# Allegro board pc053a_toplevel_03.brd
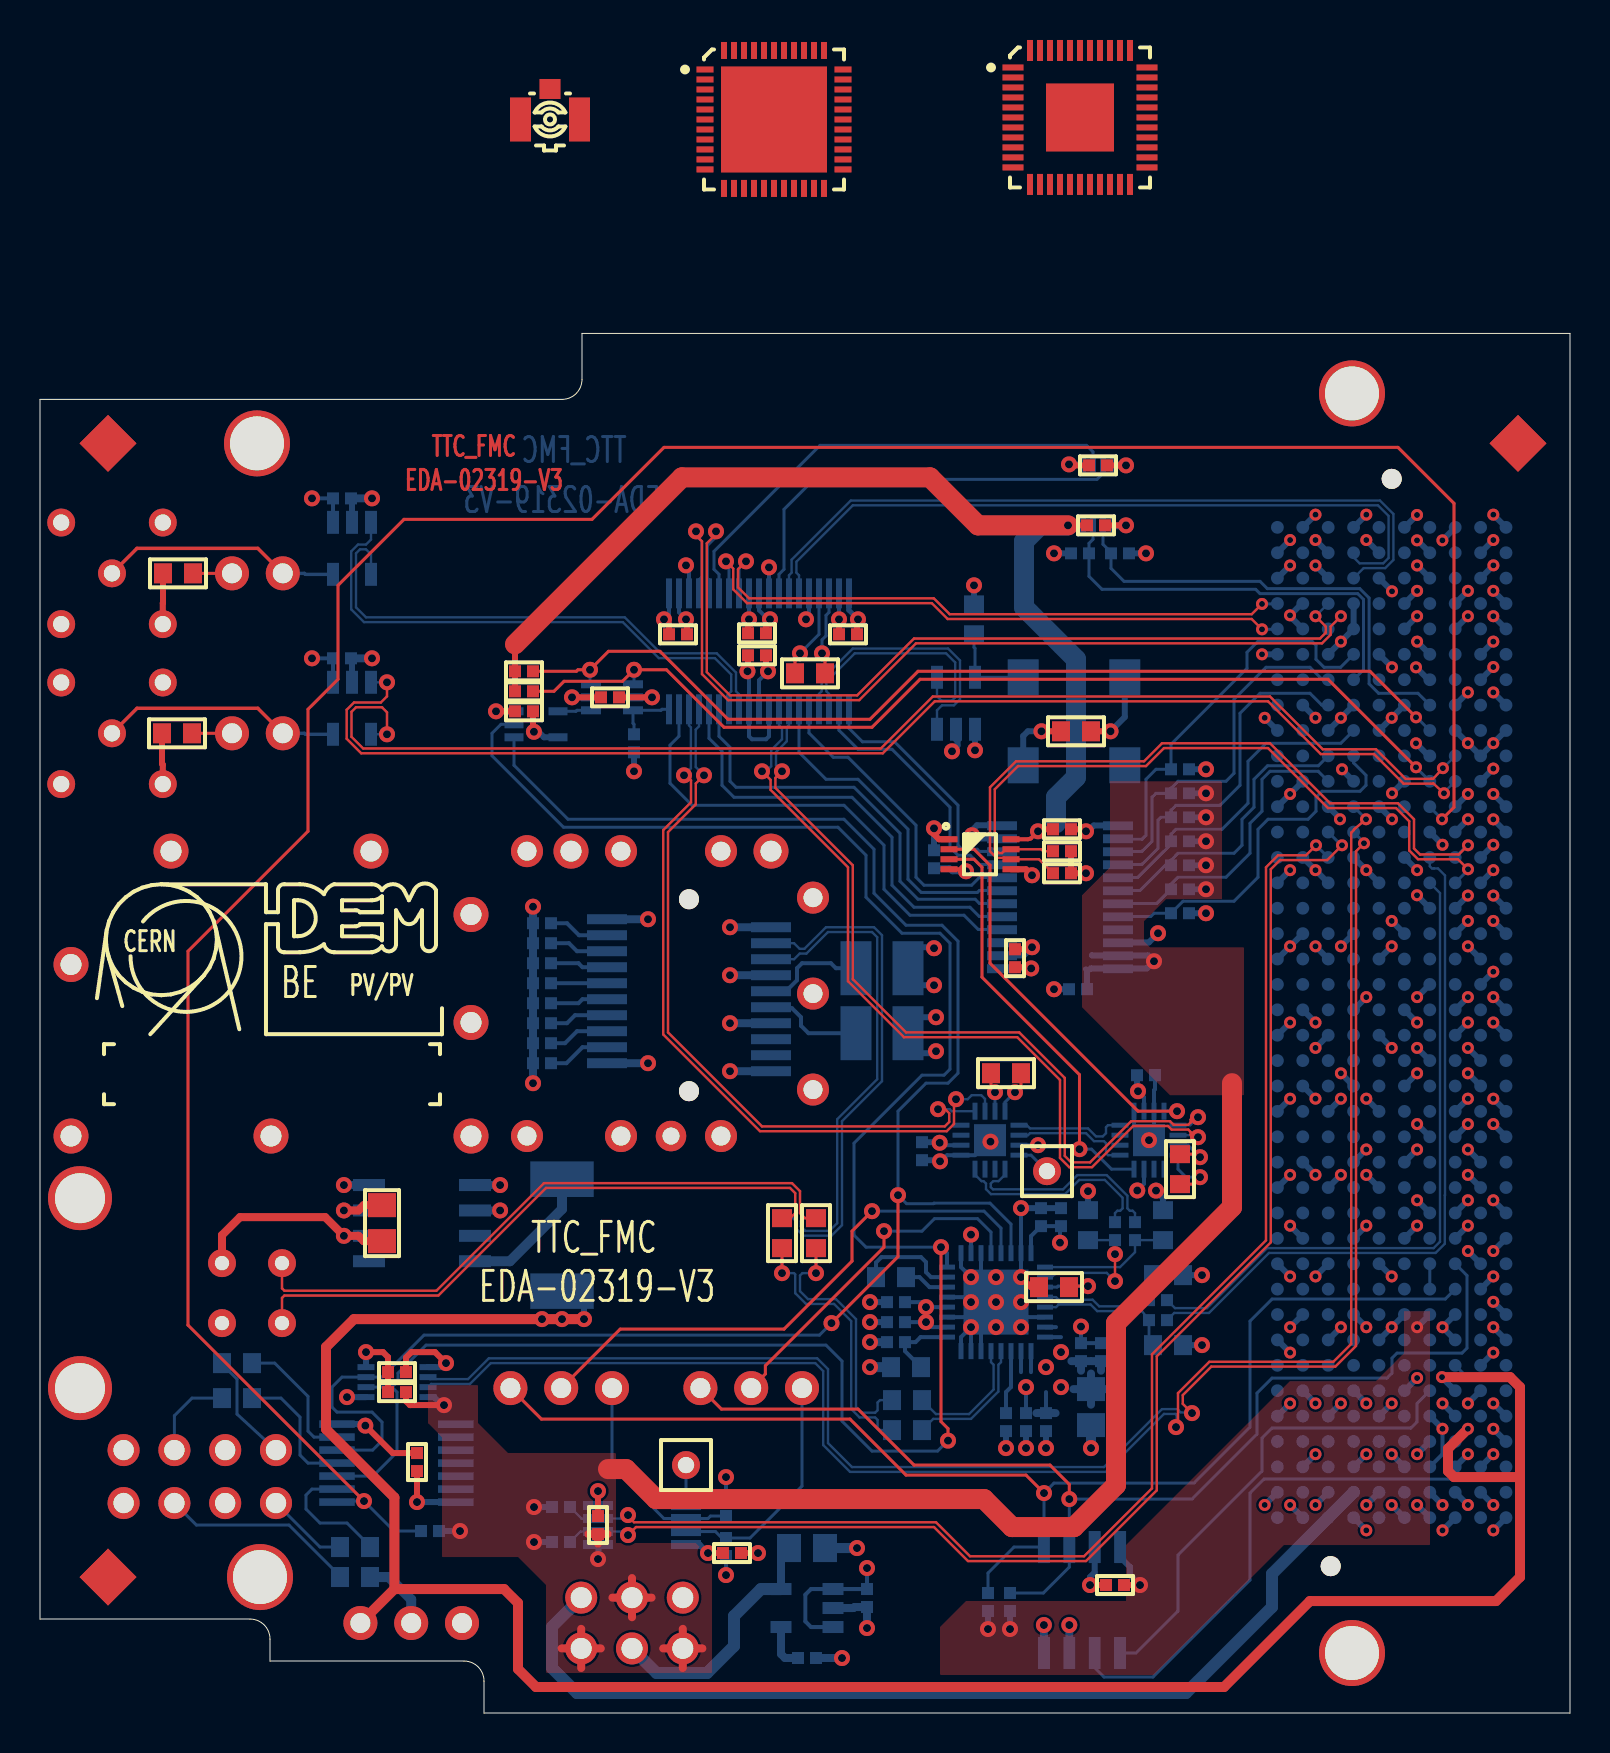
[diagram p0: board, top side]
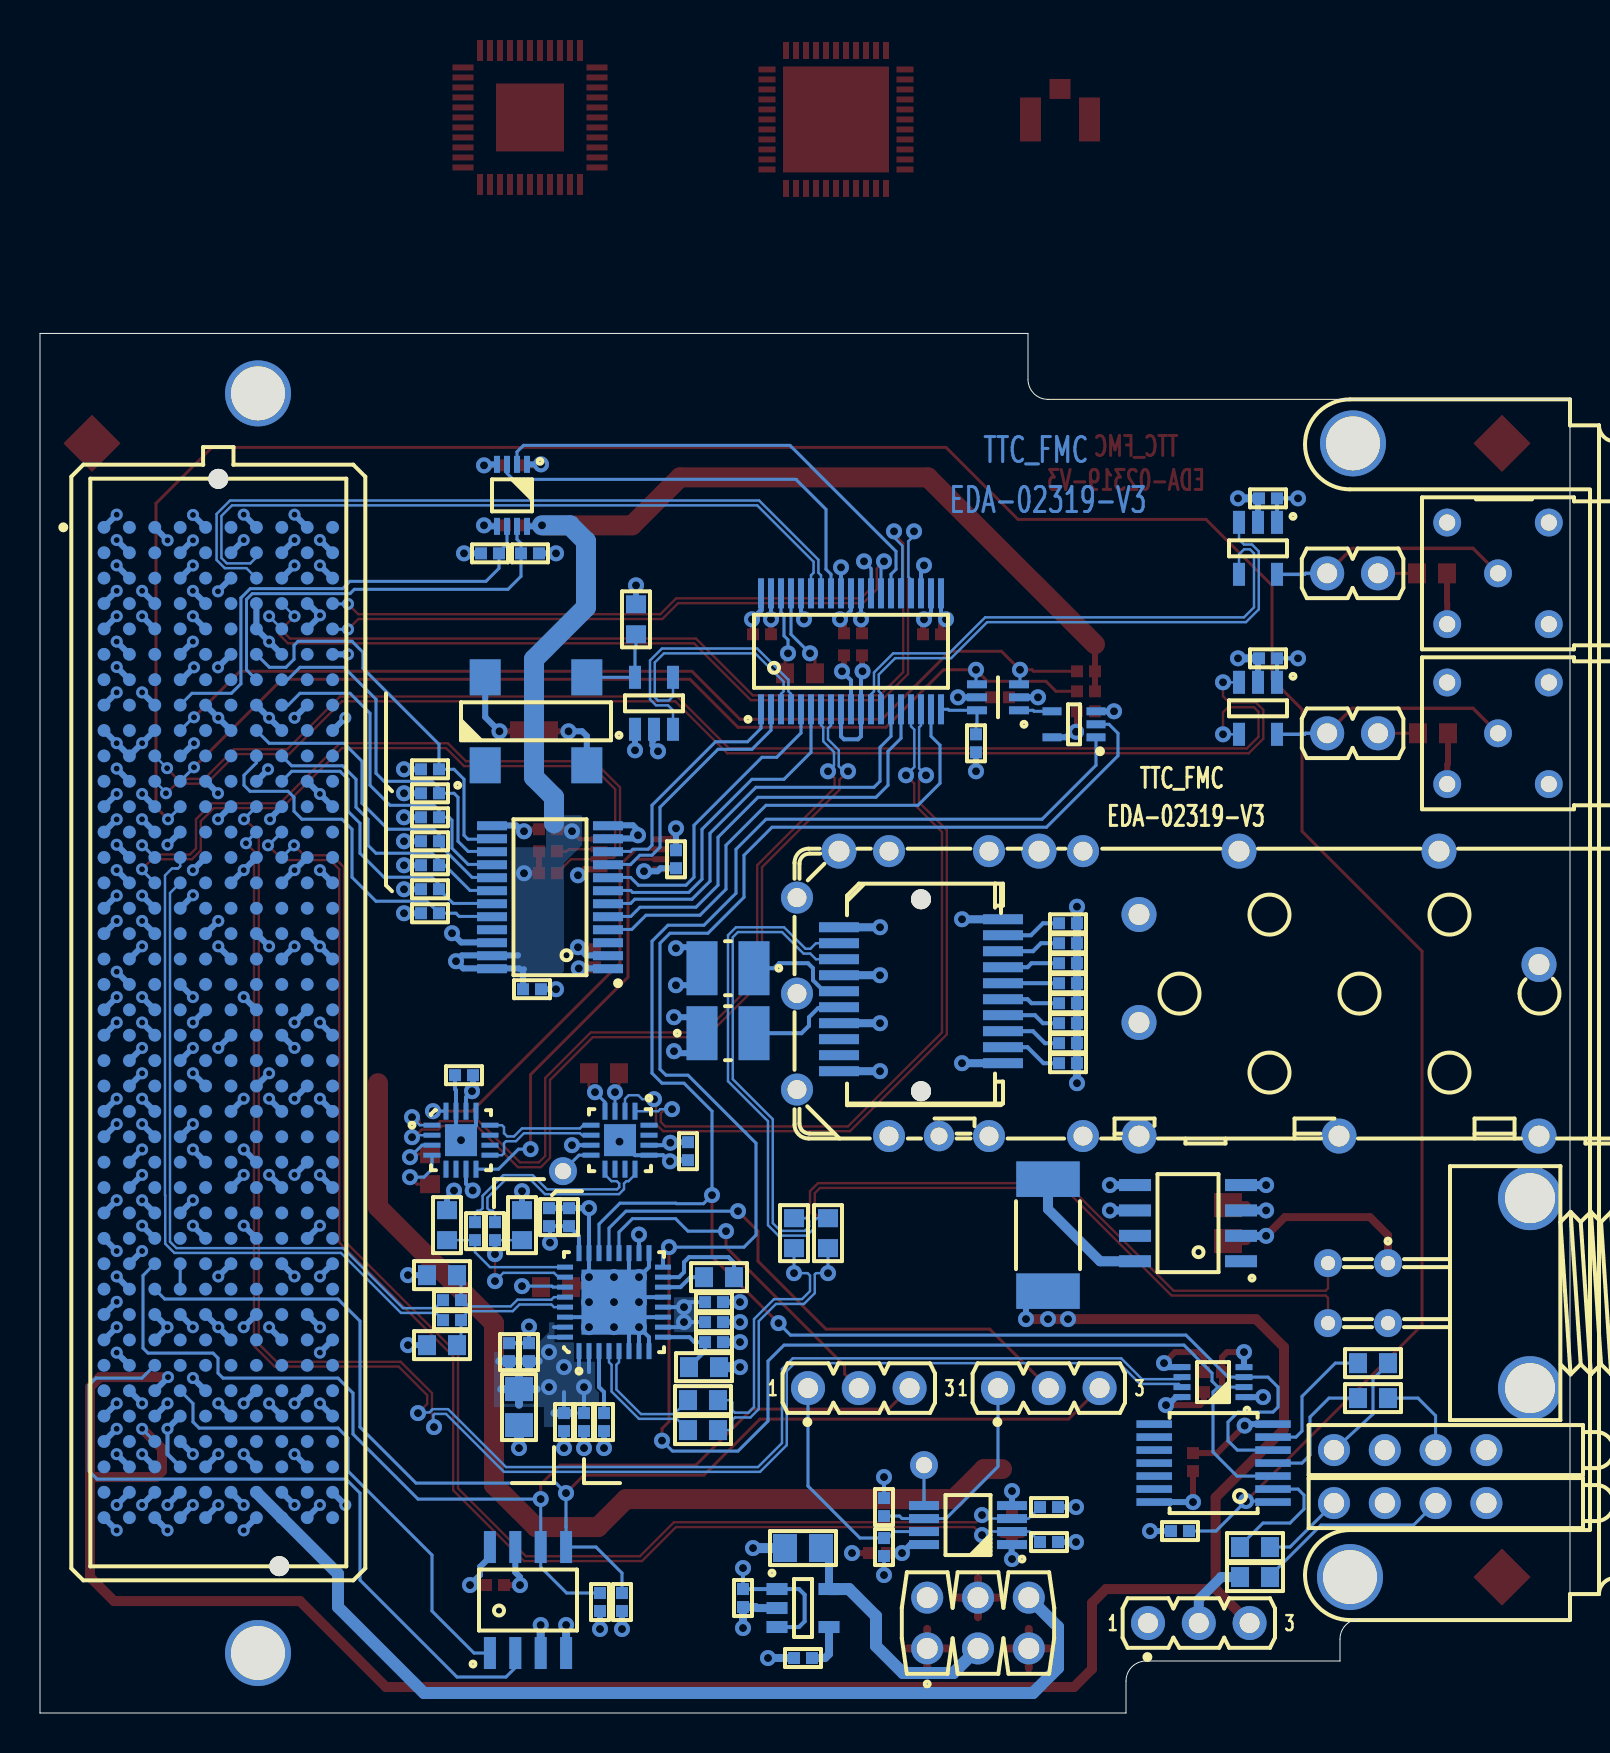
[diagram p1: board, bottom side, seen from below]

Outline 76.5 x 69 mm; copper layers: TOP, L2PWR, L3GND, BOTTOM. Coordinates in mm from the lower left corner of the outline.
Outline path: 0,65.7 26.1,65.7 arc(26.81,65.99) 27.1,66.7 27.1,69 76.5,69 76.5,0 22.2,0 22.2,1.6 arc(21.91,2.31) 21.2,2.6 11.5,2.6 11.5,3.7 arc(11.21,4.41) 10.5,4.7 0,4.7 0,65.7

## Design rules (mm)
constraint set DEFAULT: min track width 0.15
net group CDR_CLK_DIVIDED_QB0: nets CDR_CLK_DIVIDED_QB0_N CDR_CLK_DIVIDED_QB0_P
net group CDR_CLK_FANOUT_Q0: nets CDR_CLK_FANOUT_Q0_N CDR_CLK_FANOUT_Q0_P
net group CDR_CLK_FANOUT_Q2: nets CDR_CLK_FANOUT_Q2_N CDR_CLK_FANOUT_Q2_P
net group CDR_CLKOUT: nets CDR_CLKOUT_N CDR_CLKOUT_P
net group CDR_DATAOUT: nets CDR_DATAOUT_N CDR_DATAOUT_P
net group CDR_IN: nets CDR_IN_N CDR_IN_P
net group CLKOUT: nets CLKOUT_N CLKOUT_P
net group DATAOUT: nets DATAOUT_N DATAOUT_P
net group FICER: nets FICER_N FICER_P
net group FMC_CLK0_M2C: nets FMC_CLK0_M2C_N FMC_CLK0_M2C_P
net group FMC_CLK1_M2C: nets FMC_CLK1_M2C_N FMC_CLK1_M2C_P
net group FMC_CLK2_BIDIR: nets FMC_CLK2_BIDIR_N FMC_CLK2_BIDIR_P
net group FMC_LA06: nets FMC_LA06_N FMC_LA06_P
net group FMC_LA07: nets FMC_LA07_N FMC_LA07_P
net group FMC_LA08: nets FMC_LA08_N FMC_LA08_P
net group FMC_LA10: nets FMC_LA10_N FMC_LA10_P
net group FRONT_PANEL_CLK: nets FRONT_PANEL_CLK_N FRONT_PANEL_CLK_P
net group IN: nets IN_N IN_P
net group TTCSFP: nets TTCSFP_N TTCSFP_P
net group XTAL: nets XTAL_N XTAL_P
nets with their own width: min track width 0.17; nets LEMO1 LEMO2
nets with their own width: min track width 0.3; nets CVCC GND P3V3

## Placement (name value [footprint] x y rotation side)
C1  100nF  [C0402]  24.2 50.1 180 top
C2  100nF  [C0402]  28.5 50.8 180 top
C3  100nF  [C0402]  31.9 53.95 0 top
C4  100nF  [C0402]  35.85 54 180 top
C5  100nF  [C0402]  35.85 52.9 180 top
C6  100nF  [C0402]  40.4 53.95 180 top
C7  100nF  [C0402]  52.9 62.4 0 top
C8  100nF  [C0402]  52.8 59.4 180 top
C9  10nF  [C0603]  51.8 49.1 180 top
C10  100nF  [C0402]  51.1 44.2 180 top
C11  100nF  [C0402]  48.75 37.75 270 top
C12  10uF  [C0805]  17.1 24.5 270 top
C13  100nF  [C0402]  17.85 17.05 180 top
C14  100nF  [C0402]  17.85 16.05 0 top
C15  100nF  [C0402]  18.85 12.55 270 top
C16  100nF  [C0402]  27.9 9.4 270 top
C17  100nF  [C0402]  34.6 8 180 top
C18  100nF  [C0402]  53.75 6.4 0 top
C19  15pF  [C0603]  46.7 54.7 270 bottom
C20  100nF  [C0402]  29.7 48.5 270 bottom
C21  100nF  [C0402]  15.1 60.75 180 bottom
C22  100nF  [C0402]  15.1 52.75 180 bottom
C23  100nF  [C0402]  51.9 36.2 0 bottom
C24  100nF  [C0402]  44.7 42.7 270 bottom
C25  100nF  [C0402]  55.3 31.9 180 bottom
C26  100nF  [C0402]  44.1 28.1 90 bottom
C27  100nF  [C0402]  54.75 24.1 90 bottom
C28  100nF  [C0402]  53.75 24.1 90 bottom
C29  100nF  [C0402]  51.05 24.8 270 bottom
C30  1.0nF  [C0402]  50.05 24.8 270 bottom
C31  100nF  [C0402]  55.9 20.65 0 bottom
C32  100nF  [C0402]  55.9 19.65 0 bottom
C33  100nF  [C0402]  53.05 18.05 270 bottom
C34  1.0nF  [C0402]  52.05 18.05 270 bottom
C35  10uF  [C0805]  52.55 15.3 90 bottom
C36  100nF  [C0402]  50.3 14.55 90 bottom
C37  1.0nF  [C0402]  49.3 14.55 90 bottom
C38  100nF  [C0402]  48.3 14.55 90 bottom
C39  470nF  [C0603]  42.55 21.8 0 bottom
C40  100nF  [C0402]  42.8 20.55 0 bottom
C41  1.0nF  [C0402]  42.8 19.55 0 bottom
C42  100nF  [C0402]  42.8 18.55 0 bottom
C43  1.5uF  [C0603]  43.35 15.65 0 bottom
C44  1.5uF  [C0603]  43.35 14.15 0 bottom
C45  2.2uF  [C0805]  38.35 8.25 180 bottom
C46  100nF  [C0402]  41.35 5.75 90 bottom
C47  100nF  [C0402]  38.35 2.75 180 bottom
IC1  -  [SOP50P310X90-8N]  47 42.95 0 top
IC2  -  [SOP50P310X90-8N]  52.9 60.9 270 bottom
IC3  -  [SOT95P280X145-5N]  45.8 50.5 90 bottom
IC4  -  [SOP50P640X120-38N]  35.95 53.1 90 bottom
IC5  -  [SOP65P210X110-6N]  28.6 50.8 0 bottom
IC6  -  [SOP65P210X110-6_5N]  24.8 49.45 0 bottom
IC7  -  [SOT95P280X145-5N]  15.6 58.25 270 bottom
IC8  -  [SOT95P280X145-5N]  15.6 50.25 270 bottom
IC9  -  [SOP65P640X120-24N]  51 40.8 0 bottom
IC10  -  [QFN50P300X300X90-17N-S160]  55.45 28.65 180 bottom
IC11  -  [QFN50P300X300X90-17N_S160]  47.5 28.65 270 bottom
IC12  -  [QFN50P500X500X100-33N-S325]  47.8 20.55 90 bottom
IC13  -  [SOIC127P600X175-8N]  19.1 24.5 0 bottom
IC14  -  [SOIC127P600X175-8N]  52.1 5.65 90 bottom
IC15  -  [SOP65P490X110-8N]  30.1 9.4 0 bottom
IC16  -  [SOP50P310X90-8N]  17.85 16.55 0 bottom
IC17  -  [TSSOP14MA_065]  14.85 10.55 90 bottom
IC18  -  [QFN50P700X700X100-45N-S340]  52 79.8 0 top
IC19  -  [QFN50P700X700X90-45N-S530]  36.7 79.7 0 top
J1  -  [SAMTEC_SEAM-40-035-S-10-2-A]  67.58 34.53 90 bottom
J2  -  [SAMTEC_MTLW-102-07-L-S-250]  10.87 57 0 bottom
J3  -  [SAMTEC_MTLW-102-07-L-S-250]  10.87 49 0 bottom
J4  -  [TYCO_1888247-1]  32.45 35.9 0 bottom
J5  -  [SAMTEC_MTLW-103-07-L-S-250]  35.56 16.25 180 bottom
J6  -  [SAMTEC_MTLW-103-07-L-S-250]  26.06 16.25 180 bottom
J7  -  [MOLEX_90131-0123]  29.6 4.5 180 bottom
J8  -  [SAMTEC_MTLW-103-07-L-S-250]  18.56 4.5 180 bottom
L1  4.7uH  [INDC3225X220N]  42.1 37.25 0 bottom
L2  4.7uH  [INDC3225X220N]  42.1 34 180 bottom
LD1  -  [LED2_CBI571]  11.8 13.15 0 bottom
LD2  -  [LED2_CBI571]  11.8 10.5 0 bottom
LM1  -  [PLEMO80]  3.6 57 180 bottom
LM2  -  [PLEMO80]  3.6 49 180 bottom
NOREF  -  []  -34.4 -47 0 top
NOREF#2  -  []  -2.4 48 0 top
NOREF#3  -  []  76.5 0 90 top
NOREF#4  -  []  26.9 66.1 0 top
NOREF#5  -  []  -14.3 0 0 top
NOREF#6  -  []  -18.77 254.4 0 top
NOREF#7  -  []  -14.4 165.4 0 top
NOREF#8  -  []  79.5 0 90 top
NOREF#9  -  []  65.6 3 0 top
NOREF#10  -  []  79.4 51.5 0 top
NOREF#11  -  []  0 4.7 90 top
NOREF#12  -  [unnamed#2]  65.6 66 0 top
NOREF#13  -  []  76 101.5 0 top
NOREF#14  -  []  0 4.65 0 top
NOREF#15  -  []  11 63.45 90 top
NOREF#16  -  []  266.9 -16.15 0 top
NOREF#17  -  []  76 17.5 0 top
NOREF#18  -  []  -14.3 69 0 top
NOREF#19  -  []  -18.77 249.4 0 top
NOREF#20  -  [unnamed#3]  73.9 63.5 0 top
NOREF#21  -  []  96.5 -16 0 top
NOREF#22  -  []  0 65.7 0 top
NOREF#23  -  []  0 -3 0 top
NOREF#24  -  []  14.55 78.9 0 top
NOREF#25  -  []  -17.4 170.4 0 top
NOREF#26  -  []  36.8 -3.6 0 top
NOREF#27  -  []  22.2 -3 0 top
NOREF#28  -  []  22 2.2 0 top
NOREF#29  -  []  -7.4 -16.15 0 top
NOREF#30  -  []  0 65.7 0 top
NOREF#31  -  []  76 135.5 0 top
NOREF#32  -  []  109.15 64.3 0 top
NOREF#33  -  []  2.6 -16.15 0 top
NOREF#34  -  [unnamed#2]  11 6.8 0 top
NOREF#35  -  []  -19.38 84 0 top
NOREF#36  -  []  0 -16 0 top
NOREF#37  -  []  193.22 -17.27 0 top
NOREF#38  -  []  -14.4 -12.4 0 top
NOREF#39  -  [unnamed#3]  3.4 63.5 0 top
NOREF#40  -  []  133.3 -3.6 0 top
NOREF#41  -  []  -17.4 -17.4 0 top
NOREF#42  -  [unnamed#2]  65.6 3 0 top
NOREF#43  -  []  0 64.3 0 top
NOREF#44  -  []  173 -16 0 top
NOREF#45  -  []  11.5 -2.5 0 top
NOREF#46  -  []  180.4 -21.05 0 top
NOREF#47  -  []  76 219.5 0 top
NOREF#48  -  []  0 0 0 top
NOREF#49  -  []  76 185.5 0 top
NOREF#50  -  []  -17.4 -17.4 0 top
NOREF#51  -  []  27.1 69 0 top
NOREF#52  -  []  -17.4 -17.4 0 top
NOREF#53  -  []  22.2 0 90 top
NOREF#54  -  []  11.5 2.6 0 top
NOREF#55  -  []  76.5 -16 0 top
NOREF#56  -  []  11.5 2.6 90 top
NOREF#57  -  []  11.21 4.4 0 top
NOREF#58  -  []  -19.38 153 0 top
NOREF#59  -  [unnamed#2]  10.85 63.5 0 top
NOREF#60  -  []  -14.3 237 0 top
NOREF#61  -  []  -14.3 168 0 top
NOREF#62  -  []  12.65 64.3 0 top
NOREF#63  -  [unnamed#3]  3.4 6.8 0 top
OPT1  -  [FICER_FTPDA-R155-ST]  8.1 21 180 bottom
PX1  -  [HIROSE_U-FL-R-SMT-1_10]  25.5 79.7 0 top
QZ1  -  [OSCSC508P520X750X140-4N]  51.7 49.6 90 bottom
R1  51  [C0603]  6.9 57 0 top
R2  51  [C0603]  6.85 49 0 top
R3  4.7k  [C0402]  24.2 52.1 180 top
R4  4.7k  [C0402]  24.2 51.1 180 top
R5  100  [C0603]  38.5 52 180 top
R6  4.7k  [C0402]  51.1 43.1 0 top
R7  4.7k  [C0402]  51.1 42 0 top
R8  00  [C0603]  37.1 24 270 top
R9  00  [C0603]  38.8 24 270 top
R10  100  [C0603]  48.3 32 0 top
R11  100  [C0603]  57 27.2 270 top
R12  00  [C0603]  50.7 21.3 180 top
R13  4.7k  [C0402]  54 58 180 bottom
R14  4.7k  [C0402]  52 58 0 bottom
R15  4.7k  [C0402]  57 47.2 0 bottom
R16  4.7k  [C0402]  57 46 0 bottom
R17  4.7k  [C0402]  57 44.8 0 bottom
R18  4.7k  [C0402]  57 43.6 0 bottom
R19  4.7k  [C0402]  57 42.4 0 bottom
R20  4.7k  [C0402]  57 41.2 0 bottom
R21  4.7k  [C0402]  57 40 0 bottom
R22  4.7k  [C0402]  25.1 39.5 0 bottom
R23  4.7k  [C0402]  25.1 38.5 0 bottom
R24  4.7k  [C0402]  25.1 37.5 180 bottom
R25  4.7k  [C0402]  25.1 36.5 180 bottom
R26  4.7k  [C0402]  25.1 35.5 180 bottom
R27  4.7k  [C0402]  25.1 34.5 180 bottom
R28  4.7k  [C0402]  25.1 33.5 0 bottom
R29  4.7k  [C0402]  25.1 32.5 0 bottom
R30  100  [C0603]  56.15 24.4 90 bottom
R31  100  [C0603]  52.4 24.4 90 bottom
R32  100  [C0603]  56.4 21.9 0 bottom
R33  100  [C0603]  56.4 18.4 0 bottom
R34  00  [C0603]  43.3 17.3 0 bottom
R35  00  [C0603]  38.8 24 270 bottom
R36  00  [C0603]  37.1 24 270 bottom
R37  120  [C2512]  26.1 21.1 90 bottom
R38  4.7k  [C0402]  48.5 5.55 270 bottom
R39  4.7k  [C0402]  47.4 5.55 270 bottom
R40  4.7k  [C0402]  34.3 10.3 270 bottom
R41  4.7k  [C0402]  34.3 8.3 90 bottom
R42  4.7k  [C0402]  26.05 10.3 180 bottom
R43  4.7k  [C0402]  26.05 8.55 180 bottom
R44  4.7k  [C0402]  19.5 9.1 0 bottom
R45  100  [C0603]  15.75 8.3 0 bottom
R46  100  [C0603]  15.75 6.8 0 bottom
R47  100  [C0603]  9.85 17.5 0 bottom
R48  100  [C0603]  9.85 15.75 0 bottom
REG1  -  [SOT95P280X110-5N]  38.35 5.25 180 bottom
SFP1  -  [MOLEX_74737004]  32.45 35.95 0 bottom
TP1  -  [TP_HOLE_08]  50.35 27.1 0 top
TP2  -  [TP_HOLE_08]  32.3 12.4 0 top

## Library data of the parts
C1-C8 C10 C11 C13-C18 C20-C29 C31-C33 C36 C38 C40 C42 C46 C47 = CAPCERSMDCL2: part number: CAPCERSMDCL2_0402-100NF,16V_GEN; tolerance: 10%
C9 = CAPCERSMDCL2: part number: CAPCERSMDCL2_0603-10NF,50V_X7R; tolerance: 10%
C12 C35 = CAPCERSMDCL2: part number: CAPCERSMDCL2_0805-10UF,16V; tolerance: 10%
C19 = CAPCERSMDCL1: part number: CAPCERSMDCL1_0603-15PF,50V; tolerance: 5%
C30 C34 C37 C41 = CAPCERSMDCL2: part number: CAPCERSMDCL2_0402-1.0NF,50V_GEN; tolerance: 10%
C39 = CAPCERSMDCL2: part number: CAPCERSMDCL2_0603-470NF,6.3V; tolerance: 10%
C43 C44 = CAPCERSMDCL2: part number: CAPCERSMDCL2_0603-1.5UF,6.3V; tolerance: 10%
C45 = CAPCERSMDCL2: part number: CAPCERSMDCL2_0805-2.2UF,10V_GEN; tolerance: +80%-20%
IC1 IC2 IC16 = 74AVC2T45: part number: SN74AVC2T45DCU
IC3 IC7 IC8 = SN65LVDS1: part number: SN65LVDS1DBV
IC4 = SN65LVDT125: part number: SN65LVDT125DBT
IC5 = 74AUP1T157: part number: SN74AUP1T157DCK
IC6 = 74AHC1G02: part number: SN74AHC1G02DCK
IC9 = 74AVC8T245: part number: SN74AVC8T245PW
IC10 = SY89873L: part number: SY89873LMG
IC11 = SY89833L: part number: SY89833LMG
IC12 = ADN2814: part number: ADN2814ACPZ
IC13 = ADP3367: part number: ADP3367ARZ
IC14 = 24AA025E48: part number: 24AA025E48T-I/SN
IC15 = PCA9517: part number: PCA9517DGKR
IC17 = 74LCX04: part number: 74LCX04MTC
IC18 = SY89540U: part number: SY89540UMY
IC19 = SI5344: part number: SI5344B-B-GM
J1 = CON400P_40ABCDEFGHJK: part number: CON400P_40ABCDEFGHJK-SEAM-40-03.5-S-10-2-A-K-TR
J2 J3 = CON2P: part number: CON2P-MTLW-102-07-L-S-250
J4 = CON20P_SFP: part number: CON20P_SFP-1888247-1
J5 J6 J8 = CON3P: part number: CON3P-MTLW-103-07-L-S-250
J7 = CON6P: part number: CON6P-90131-0123
L1 L2 = INDUCTANCE: part number: INDUCTANCE_LQH32C_23-4.7UH
LD1 LD2 = LED2: part number: 571-0112F
LM1 LM2 = COAX: part number: COAX-PLEMO00C
OPT1 = FTPDA_R155_ST: part number: FTPDA-R155-ST
PX1 = PCOAX: part number: PCOAX-U.FL-R-SMT-1(10)
QZ1 = QZ_FXO_HC73: part number: FXO-HC736R-40
R1 R2 = RSMD0603: part number: RSMD0603_1/10W-51,1%; tolerance: 1%
R3 R4 R6 R7 R13-R29 R38-R44 = RSMD0402: part number: RSMD0402_1/16W-4.7K,1%; tolerance: 1%
R5 R10 R11 R30-R33 R45-R48 = RSMD0603: part number: RSMD0603_1/10W-100,1%; tolerance: 1%
R8 R9 R12 R34-R36 = RSMD0603: part number: RSMD0603_-00,
R37 = RSMD2512: part number: RSMD2512_1W_GEN-120,5%; tolerance: 5%
REG1 = TPS799XX: part number: TPS79925DDCT
SFP1 = SFP_CAGE: part number: SFP_CAGE-SP-74737-004
TP1 TP2 = TP: part number: TP_HOLE-0.8MM

## Footprints (pads in the part's own frame, mm; a bottom-side part is the same pattern mirrored in y, then rotated)
C0402
  rect 0.6x0.6 smd: 1(-0.45,0) 2(0.45,0)
C0603
  rect 0.9x1 smd: 1(-0.75,0) 2(0.75,0)
C0805
  rect 1.2x1.4 smd: 1(-0.9,0) 2(0.9,0)
C2512
  rect 1.778x3.175 smd: 1(0,0) 2(5.6,0)
FICER_FTPDA-R155-ST
  round 3.2 hole 2.5: (6.1,-4.75) (6.1,4.75)
  round 1.397 hole 0.711: 1(-1,1.5) 2(-4,1.5) 3(-4,-1.5) 4(-1,-1.5)
HIROSE_U-FL-R-SMT-1_10
  rect 1.05x1 smd: 1(0,1.525)
  rect 1.05x2.2 smd: 2(-1.475,0) 3(1.475,0)
INDC3225X220N
  rect 1.55x2.7 smd: 1(-1.3,0) 2(1.3,0)
LED2_CBI571
  round 1.6 hole 1.016: 1(0,0) 2(-2.54,0) 3(-5.08,0) 4(-7.62,0)
MOLEX_90131-0123
  round 1.6 hole 1.05: 1(-2.54,-1.27) 2(-2.54,1.27) 3(0,-1.27) 4(0,1.27) 5(2.54,-1.27) 6(2.54,1.27)
MOLEX_74737004
  round 1.524 hole 0.85: 1(-0.9,7.094)
  round 1.75 hole 1.05: 2(-10.9,7.094) 3(-20.9,7.094) 4(-30.9,7.094) 5(-25.9,-7.156) 6(-15.9,-7.156) 7(-5.9,-7.156) 8(4.1,-7.156) 9(-10.9,1.414) 10(-10.9,-3.986) 11(-30.9,-1.486)
  round 1.6 hole 0.95: 12(-8.1,7.094) 13(-8.1,-7.156) 14(-3.4,7.094) 15(-3.4,-7.156) 16(1.6,7.094) 17(1.6,-7.156) 18(6.2,4.769) 19(6.2,-0.031) 20(6.2,-4.831)
  round 0 smd: NC(-4.1,3.369)
OSCSC508P520X750X140-4N
  rect 1.8x1.55 smd: 1(-2.2,2.54) 2(-2.2,-2.54) 3(2.2,-2.54) 4(2.2,2.54)
PLEMO80
  round 1.397 hole 0.813: 1(0,0) 2(2.54,-2.54) 3(2.54,2.54) 4(-2.54,2.54) 5(-2.54,-2.54)
QFN50P300X300X90-17N-S160
  rect 0.85x0.25 smd: 1(-1.45,0.75) 2(-1.45,0.25) 3(-1.45,-0.25) 4(-1.45,-0.75) 9(1.45,-0.75) 10(1.45,-0.25) 11(1.45,0.25) 12(1.45,0.75)
  rect 0.25x0.85 smd: 5(-0.75,-1.45) 6(-0.25,-1.45) 7(0.25,-1.45) 8(0.75,-1.45) 13(0.75,1.45) 14(0.25,1.45) 15(-0.25,1.45) 16(-0.75,1.45)
  rect 1.6x1.6 smd: 17(0,0)
QFN50P300X300X90-17N_S160
  rect 0.85x0.25 smd: 1(-1.45,0.75) 2(-1.45,0.25) 3(-1.45,-0.25) 4(-1.45,-0.75) 9(1.45,-0.75) 10(1.45,-0.25) 11(1.45,0.25) 12(1.45,0.75)
  rect 0.25x0.85 smd: 5(-0.75,-1.45) 6(-0.25,-1.45) 7(0.25,-1.45) 8(0.75,-1.45) 13(0.75,1.45) 14(0.25,1.45) 15(-0.25,1.45) 16(-0.75,1.45)
  rect 1.6x1.6 smd: 17(0,0)
QFN50P500X500X100-33N-S325
  rect 0.8x0.25 smd: 1(-2.45,1.75) 2(-2.45,1.25) 3(-2.45,0.75) 4(-2.45,0.25) 5(-2.45,-0.25) 6(-2.45,-0.75) 7(-2.45,-1.25) 8(-2.45,-1.75) 17(2.45,-1.75) 18(2.45,-1.25) 19(2.45,-0.75) 20(2.45,-0.25) 21(2.45,0.25) 22(2.45,0.75) 23(2.45,1.25) 24(2.45,1.75)
  rect 0.25x0.8 smd: 9(-1.75,-2.45) 10(-1.25,-2.45) 11(-0.75,-2.45) 12(-0.25,-2.45) 13(0.25,-2.45) 14(0.75,-2.45) 15(1.25,-2.45) 16(1.75,-2.45) 25(1.75,2.45) 26(1.25,2.45) 27(0.75,2.45) 28(0.25,2.45) 29(-0.25,2.45) 30(-0.75,2.45) 31(-1.25,2.45) 32(-1.75,2.45)
  rect 3.25x3.25 smd: 33(0,0)
QFN50P700X700X90-45N-S530
  rect 0.85x0.3 smd: 1(-3.45,2.5) 2(-3.45,2) 3(-3.45,1.5) 4(-3.45,1) 5(-3.45,0.5) 6(-3.45,0) 7(-3.45,-0.5) 8(-3.45,-1) 9(-3.45,-1.5) 10(-3.45,-2) 11(-3.45,-2.5) 23(3.45,-2.5) 24(3.45,-2) 25(3.45,-1.5) 26(3.45,-1) 27(3.45,-0.5) 28(3.45,0) 29(3.45,0.5) 30(3.45,1) 31(3.45,1.5) 32(3.45,2) 33(3.45,2.5)
  rect 0.3x0.85 smd: 12(-2.5,-3.45) 13(-2,-3.45) 14(-1.5,-3.45) 15(-1,-3.45) 16(-0.5,-3.45) 17(0,-3.45) 18(0.5,-3.45) 19(1,-3.45) 20(1.5,-3.45) 21(2,-3.45) 22(2.5,-3.45) 34(2.5,3.45) 35(2,3.45) 36(1.5,3.45) 37(1,3.45) 38(0.5,3.45) 39(0,3.45) 40(-0.5,3.45) 41(-1,3.45) 42(-1.5,3.45) 43(-2,3.45) 44(-2.5,3.45)
  rect 5.3x5.3 smd: 45(0,0)
QFN50P700X700X100-45N-S340
  rect 1.05x0.3 smd: 1(-3.35,2.5) 2(-3.35,2) 3(-3.35,1.5) 4(-3.35,1) 5(-3.35,0.5) 6(-3.35,0) 7(-3.35,-0.5) 8(-3.35,-1) 9(-3.35,-1.5) 10(-3.35,-2) 11(-3.35,-2.5) 23(3.35,-2.5) 24(3.35,-2) 25(3.35,-1.5) 26(3.35,-1) 27(3.35,-0.5) 28(3.35,0) 29(3.35,0.5) 30(3.35,1) 31(3.35,1.5) 32(3.35,2) 33(3.35,2.5)
  rect 0.3x1.05 smd: 12(-2.5,-3.35) 13(-2,-3.35) 14(-1.5,-3.35) 15(-1,-3.35) 16(-0.5,-3.35) 17(0,-3.35) 18(0.5,-3.35) 19(1,-3.35) 20(1.5,-3.35) 21(2,-3.35) 22(2.5,-3.35) 34(2.5,3.35) 35(2,3.35) 36(1.5,3.35) 37(1,3.35) 38(0.5,3.35) 39(0,3.35) 40(-0.5,3.35) 41(-1,3.35) 42(-1.5,3.35) 43(-2,3.35) 44(-2.5,3.35)
  rect 3.4x3.4 smd: 45(0,0)
SAMTEC_MTLW-102-07-L-S-250
  round 1.7 hole 1: 1(-1.27,0) 2(1.27,0)
SAMTEC_MTLW-103-07-L-S-250
  round 1.7 hole 1: 1(-2.54,0) 2(0,0) 3(2.54,0)
SAMTEC_SEAM-40-035-S-10-2-A
  round 1 hole 1.3 unplated: (-27.19,-3.05) (27.19,0)
  round 0.64 smd: A1(24.765,5.715) A2(23.495,5.715) A3(22.225,5.715) A4(20.955,5.715) A5(19.685,5.715) A6(18.415,5.715) A7(17.145,5.715) A8(15.875,5.715) A9(14.605,5.715) A10(13.335,5.715) A11(12.065,5.715) A12(10.795,5.715) A13(9.525,5.715) A14(8.255,5.715) A15(6.985,5.715) A16(5.715,5.715) A17(4.445,5.715) A18(3.175,5.715) A19(1.905,5.715) A20(0.635,5.715) A21(-0.635,5.715) A22(-1.905,5.715) A23(-3.175,5.715) A24(-4.445,5.715) A25(-5.715,5.715) A26(-6.985,5.715) A27(-8.255,5.715) A28(-9.525,5.715) A29(-10.795,5.715) A30(-12.065,5.715) A31(-13.335,5.715) A32(-14.605,5.715) A33(-15.875,5.715) A34(-17.145,5.715) A35(-18.415,5.715) A36(-19.685,5.715) A37(-20.955,5.715) A38(-22.225,5.715) A39(-23.495,5.715) A40(-24.765,5.715) B1(24.765,4.445) B2(23.495,4.445) B3(22.225,4.445) B4(20.955,4.445) B5(19.685,4.445) B6(18.415,4.445) B7(17.145,4.445) B8(15.875,4.445) B9(14.605,4.445) B10(13.335,4.445) B11(12.065,4.445) B12(10.795,4.445) B13(9.525,4.445) B14(8.255,4.445) B15(6.985,4.445) B16(5.715,4.445) B17(4.445,4.445) B18(3.175,4.445) B19(1.905,4.445) B20(0.635,4.445) B21(-0.635,4.445) B22(-1.905,4.445) B23(-3.175,4.445) B24(-4.445,4.445) B25(-5.715,4.445) B26(-6.985,4.445) B27(-8.255,4.445) B28(-9.525,4.445) B29(-10.795,4.445) B30(-12.065,4.445) B31(-13.335,4.445) B32(-14.605,4.445) B33(-15.875,4.445) B34(-17.145,4.445) B35(-18.415,4.445) B36(-19.685,4.445) B37(-20.955,4.445) B38(-22.225,4.445) B39(-23.495,4.445) B40(-24.765,4.445) C1(24.765,3.175) C2(23.495,3.175) C3(22.225,3.175) C4(20.955,3.175) C5(19.685,3.175) C6(18.415,3.175) C7(17.145,3.175) C8(15.875,3.175) C9(14.605,3.175) C10(13.335,3.175) C11(12.065,3.175) C12(10.795,3.175) C13(9.525,3.175) C14(8.255,3.175) C15(6.985,3.175) C16(5.715,3.175) C17(4.445,3.175) C18(3.175,3.175) C19(1.905,3.175) C20(0.635,3.175) C21(-0.635,3.175) C22(-1.905,3.175) C23(-3.175,3.175) C24(-4.445,3.175) C25(-5.715,3.175) C26(-6.985,3.175) C27(-8.255,3.175) C28(-9.525,3.175) C29(-10.795,3.175) C30(-12.065,3.175) C31(-13.335,3.175) C32(-14.605,3.175) C33(-15.875,3.175) C34(-17.145,3.175) C35(-18.415,3.175) C36(-19.685,3.175) C37(-20.955,3.175) C38(-22.225,3.175) C39(-23.495,3.175) C40(-24.765,3.175) D1(24.765,1.905) D2(23.495,1.905) D3(22.225,1.905) D4(20.955,1.905) D5(19.685,1.905) D6(18.415,1.905) D7(17.145,1.905) D8(15.875,1.905) D9(14.605,1.905) D10(13.335,1.905) D11(12.065,1.905) D12(10.795,1.905) D13(9.525,1.905) D14(8.255,1.905) D15(6.985,1.905) D16(5.715,1.905) D17(4.445,1.905) D18(3.175,1.905) D19(1.905,1.905) D20(0.635,1.905) D21(-0.635,1.905) D22(-1.905,1.905) D23(-3.175,1.905) D24(-4.445,1.905) D25(-5.715,1.905) D26(-6.985,1.905) D27(-8.255,1.905) D28(-9.525,1.905) D29(-10.795,1.905) D30(-12.065,1.905) D31(-13.335,1.905) D32(-14.605,1.905) D33(-15.875,1.905) D34(-17.145,1.905) D35(-18.415,1.905) D36(-19.685,1.905) D37(-20.955,1.905) D38(-22.225,1.905) D39(-23.495,1.905) D40(-24.765,1.905) E1(24.765,0.635) E2(23.495,0.635) E3(22.225,0.635) E4(20.955,0.635) E5(19.685,0.635) E6(18.415,0.635) E7(17.145,0.635) E8(15.875,0.635) E9(14.605,0.635) E10(13.335,0.635) E11(12.065,0.635) E12(10.795,0.635) E13(9.525,0.635) E14(8.255,0.635) E15(6.985,0.635) E16(5.715,0.635) E17(4.445,0.635) E18(3.175,0.635) E19(1.905,0.635) E20(0.635,0.635) E21(-0.635,0.635) E22(-1.905,0.635) E23(-3.175,0.635) E24(-4.445,0.635) E25(-5.715,0.635) E26(-6.985,0.635) E27(-8.255,0.635) E28(-9.525,0.635) E29(-10.795,0.635) E30(-12.065,0.635) E31(-13.335,0.635) E32(-14.605,0.635) E33(-15.875,0.635) E34(-17.145,0.635) E35(-18.415,0.635) E36(-19.685,0.635) E37(-20.955,0.635) E38(-22.225,0.635) E39(-23.495,0.635) E40(-24.765,0.635) F1(24.765,-0.635) F2(23.495,-0.635) F3(22.225,-0.635) F4(20.955,-0.635) F5(19.685,-0.635) F6(18.415,-0.635) F7(17.145,-0.635) F8(15.875,-0.635) F9(14.605,-0.635) F10(13.335,-0.635) F11(12.065,-0.635) F12(10.795,-0.635) F13(9.525,-0.635) F14(8.255,-0.635) F15(6.985,-0.635) F16(5.715,-0.635) F17(4.445,-0.635) F18(3.175,-0.635) F19(1.905,-0.635) F20(0.635,-0.635) F21(-0.635,-0.635) F22(-1.905,-0.635) F23(-3.175,-0.635) F24(-4.445,-0.635) F25(-5.715,-0.635) F26(-6.985,-0.635) F27(-8.255,-0.635) F28(-9.525,-0.635) F29(-10.795,-0.635) F30(-12.065,-0.635) F31(-13.335,-0.635) F32(-14.605,-0.635) F33(-15.875,-0.635) F34(-17.145,-0.635) F35(-18.415,-0.635) F36(-19.685,-0.635) F37(-20.955,-0.635) F38(-22.225,-0.635) F39(-23.495,-0.635) F40(-24.765,-0.635) G1(24.765,-1.905) G2(23.495,-1.905) G3(22.225,-1.905) G4(20.955,-1.905) G5(19.685,-1.905) G6(18.415,-1.905) G7(17.145,-1.905) G8(15.875,-1.905) G9(14.605,-1.905) G10(13.335,-1.905) G11(12.065,-1.905) G12(10.795,-1.905) G13(9.525,-1.905) G14(8.255,-1.905) G15(6.985,-1.905) G16(5.715,-1.905) G17(4.445,-1.905) G18(3.175,-1.905) G19(1.905,-1.905) G20(0.635,-1.905) G21(-0.635,-1.905) G22(-1.905,-1.905) G23(-3.175,-1.905) G24(-4.445,-1.905) G25(-5.715,-1.905) G26(-6.985,-1.905) G27(-8.255,-1.905) G28(-9.525,-1.905) G29(-10.795,-1.905) G30(-12.065,-1.905) G31(-13.335,-1.905) G32(-14.605,-1.905) G33(-15.875,-1.905) G34(-17.145,-1.905) G35(-18.415,-1.905) G36(-19.685,-1.905) G37(-20.955,-1.905) G38(-22.225,-1.905) G39(-23.495,-1.905) G40(-24.765,-1.905) H1(24.765,-3.175) H2(23.495,-3.175) H3(22.225,-3.175) H4(20.955,-3.175) H5(19.685,-3.175) H6(18.415,-3.175) H7(17.145,-3.175) H8(15.875,-3.175) H9(14.605,-3.175) H10(13.335,-3.175) H11(12.065,-3.175) H12(10.795,-3.175) H13(9.525,-3.175) H14(8.255,-3.175) H15(6.985,-3.175) H16(5.715,-3.175) H17(4.445,-3.175) H18(3.175,-3.175) H19(1.905,-3.175) H20(0.635,-3.175) H21(-0.635,-3.175) H22(-1.905,-3.175) H23(-3.175,-3.175) H24(-4.445,-3.175) H25(-5.715,-3.175) H26(-6.985,-3.175) H27(-8.255,-3.175) H28(-9.525,-3.175) H29(-10.795,-3.175) H30(-12.065,-3.175) H31(-13.335,-3.175) H32(-14.605,-3.175) H33(-15.875,-3.175) H34(-17.145,-3.175) H35(-18.415,-3.175) H36(-19.685,-3.175) H37(-20.955,-3.175) H38(-22.225,-3.175) H39(-23.495,-3.175) H40(-24.765,-3.175) J1(24.765,-4.445) J2(23.495,-4.445) J3(22.225,-4.445) J4(20.955,-4.445) J5(19.685,-4.445) J6(18.415,-4.445) J7(17.145,-4.445) J8(15.875,-4.445) J9(14.605,-4.445) J10(13.335,-4.445) J11(12.065,-4.445) J12(10.795,-4.445) J13(9.525,-4.445) J14(8.255,-4.445) J15(6.985,-4.445) J16(5.715,-4.445) J17(4.445,-4.445) J18(3.175,-4.445) J19(1.905,-4.445) J20(0.635,-4.445) J21(-0.635,-4.445) J22(-1.905,-4.445) J23(-3.175,-4.445) J24(-4.445,-4.445) J25(-5.715,-4.445) J26(-6.985,-4.445) J27(-8.255,-4.445) J28(-9.525,-4.445) J29(-10.795,-4.445) J30(-12.065,-4.445) J31(-13.335,-4.445) J32(-14.605,-4.445) J33(-15.875,-4.445) J34(-17.145,-4.445) J35(-18.415,-4.445) J36(-19.685,-4.445) J37(-20.955,-4.445) J38(-22.225,-4.445) J39(-23.495,-4.445) J40(-24.765,-4.445) K1(24.765,-5.715) K2(23.495,-5.715) K3(22.225,-5.715) K4(20.955,-5.715) K5(19.685,-5.715) K6(18.415,-5.715) K7(17.145,-5.715) K8(15.875,-5.715) K9(14.605,-5.715) K10(13.335,-5.715) K11(12.065,-5.715) K12(10.795,-5.715) K13(9.525,-5.715) K14(8.255,-5.715) K15(6.985,-5.715) K16(5.715,-5.715) K17(4.445,-5.715) K18(3.175,-5.715) K19(1.905,-5.715) K20(0.635,-5.715) K21(-0.635,-5.715) K22(-1.905,-5.715) K23(-3.175,-5.715) K24(-4.445,-5.715) K25(-5.715,-5.715) K26(-6.985,-5.715) K27(-8.255,-5.715) K28(-9.525,-5.715) K29(-10.795,-5.715) K30(-12.065,-5.715) K31(-13.335,-5.715) K32(-14.605,-5.715) K33(-15.875,-5.715) K34(-17.145,-5.715) K35(-18.415,-5.715) K36(-19.685,-5.715) K37(-20.955,-5.715) K38(-22.225,-5.715) K39(-23.495,-5.715) K40(-24.765,-5.715)
SOIC127P600X175-8N
  rect 1.6x0.6 smd: 1(-2.65,1.905) 2(-2.65,0.635) 3(-2.65,-0.635) 4(-2.65,-1.905) 5(2.65,-1.905) 6(2.65,-0.635) 7(2.65,0.635) 8(2.65,1.905)
SOP50P310X90-8N
  rect 0.85x0.3 smd: 1(-1.55,0.75) 2(-1.55,0.25) 3(-1.55,-0.25) 4(-1.55,-0.75) 5(1.55,-0.75) 6(1.55,-0.25) 7(1.55,0.25) 8(1.55,0.75)
SOP50P640X120-38N
  rect 1.5x0.3 smd: 1(-2.9,4.5) 2(-2.9,4) 3(-2.9,3.5) 4(-2.9,3) 5(-2.9,2.5) 6(-2.9,2) 7(-2.9,1.5) 8(-2.9,1) 9(-2.9,0.5) 10(-2.9,0) 11(-2.9,-0.5) 12(-2.9,-1) 13(-2.9,-1.5) 14(-2.9,-2) 15(-2.9,-2.5) 16(-2.9,-3) 17(-2.9,-3.5) 18(-2.9,-4) 19(-2.9,-4.5) 20(2.9,-4.5) 21(2.9,-4) 22(2.9,-3.5) 23(2.9,-3) 24(2.9,-2.5) 25(2.9,-2) 26(2.9,-1.5) 27(2.9,-1) 28(2.9,-0.5) 29(2.9,0) 30(2.9,0.5) 31(2.9,1) 32(2.9,1.5) 33(2.9,2) 34(2.9,2.5) 35(2.9,3) 36(2.9,3.5) 37(2.9,4) 38(2.9,4.5)
SOP65P210X110-6_5N
  rect 0.95x0.4 smd: 1(-1.1,0.65) 2(-1.1,0) 3(-1.1,-0.65) 4(1.1,-0.65) 5(1.1,0.65)
SOP65P210X110-6N
  rect 1x0.4 smd: 1(-1.05,0.65) 2(-1.05,0) 3(-1.05,-0.65) 4(1.05,-0.65) 5(1.05,0) 6(1.05,0.65)
SOP65P490X110-8N
  rect 1.5x0.45 smd: 1(-2.2,0.975) 2(-2.2,0.325) 3(-2.2,-0.325) 4(-2.2,-0.975) 5(2.2,-0.975) 6(2.2,-0.325) 7(2.2,0.325) 8(2.2,0.975)
SOP65P640X120-24N
  rect 1.5x0.45 smd: 1(-2.9,3.575) 2(-2.9,2.925) 3(-2.9,2.275) 4(-2.9,1.625) 5(-2.9,0.975) 6(-2.9,0.325) 7(-2.9,-0.325) 8(-2.9,-0.975) 9(-2.9,-1.625) 10(-2.9,-2.275) 11(-2.9,-2.925) 12(-2.9,-3.575) 13(2.9,-3.575) 14(2.9,-2.925) 15(2.9,-2.275) 16(2.9,-1.625) 17(2.9,-0.975) 18(2.9,-0.325) 19(2.9,0.325) 20(2.9,0.975) 21(2.9,1.625) 22(2.9,2.275) 23(2.9,2.925) 24(2.9,3.575)
SOT95P280X110-5N
  rect 1.05x0.6 smd: 1(-1.3,0.95) 2(-1.3,0) 3(-1.3,-0.95) 4(1.3,-0.95) 5(1.3,0.95)
SOT95P280X145-5N
  rect 1.15x0.6 smd: 1(-1.3,0.95) 2(-1.3,0) 3(-1.3,-0.95) 4(1.3,-0.95) 5(1.3,0.95)
TP_HOLE_08
  round 1.397 hole 0.813: 1(0,0)
TSSOP14MA_065
  rect 0.381x1.778 smd: 1(0,0) 2(0.65,0) 3(1.3,0) 4(1.95,0) 5(2.6,0) 6(3.25,0) 7(3.9,0) 8(3.9,5.94) 9(3.25,5.94) 10(2.6,5.94) 11(1.95,5.94) 12(1.3,5.94) 13(0.65,5.94) 14(0,5.94)
TYCO_1888247-1
  round 1 hole 1.4 unplated: (0,-4.8) (0,4.8)
  rect 2x0.5 smd: 1(-4.1,3.4) 2(-4.1,2.6) 3(-4.1,1.8) 4(-4.1,1) 5(-4.1,0.2) 6(-4.1,-0.6) 7(-4.1,-1.4) 8(-4.1,-2.2) 9(-4.1,-3) 10(-4.1,-3.8) 11(4.1,-3.4) 12(4.1,-2.6) 13(4.1,-1.8) 14(4.1,-1) 15(4.1,-0.2) 16(4.1,0.6) 17(4.1,1.4) 18(4.1,2.2) 19(4.1,3) 20(4.1,3.8)
unnamed#2
  round 3.302 hole 2.7: (0,0)
unnamed#3
  rect 2.007x2.007 smd rot 45: (0,0)
  rect 2.007x2.007 smd rot 135: (0,0)

## Nets
GND: C1.2(B<0>) C2.2(B<0>) C3.2(B<0>) C4.2(B<0>) C5.2(B<0>) C6.2(B<0>) C7.2(B<0>) C8.1(A<0>) C9.2(B<0>) C10.1(A<0>) C11.1(A<0>) C12.1(A<0>) C13.2(B<0>) C14.1(A<0>) C15.1(A<0>) C16.1(A<0>) C17.1(A<0>) C18.1(A<0>) C19.1(A<0>) C20.2(B<0>) C21.1(A<0>) C22.1(A<0>) C23.1(A<0>) C24.2(B<0>) C25.1(A<0>) C26.1(A<0>) C29.1(A<0>) C30.1(A<0>) C33.1(A<0>) C34.1(A<0>) C35.1(A<0>) C36.1(A<0>) C37.1(A<0>) C38.1(A<0>) C40.1(A<0>) C41.1(A<0>) C42.1(A<0>) C45.1(A<0>) C46.1(A<0>) C47.1(A<0>) IC1.4(GND) IC1.5(DIR) IC2.4(GND) IC2.5(DIR) IC3.2 IC4.9 IC4.11 IC4.21 IC4.28 IC4.30 IC4.37 IC5.2 IC6.3 IC7.2 IC8.2 IC9.2(DIR) IC9.11 IC9.12 IC9.13 IC9.22(OE*) IC10.13 IC10.15(S1) IC10.17 IC11.13 IC11.17 IC12.6(SLICEP) IC12.7(SLICEN) IC12.8 IC12.11(REFCLKN) IC12.13 IC12.17 IC12.19(SADDRS) IC12.23 IC12.30 IC12.33(PAD) IC13.3(LBI) IC13.4 IC13.5(SHDN) IC13.6(SET) IC14.3(A2) IC14.4(VSS) IC15.4 IC16.4(GND) IC17.7 IC18.12 IC18.13 IC18.20 IC18.21 IC18.35 IC18.36 IC18.43 IC18.44 IC18.45 IC19.45 J1.A1(A<1>) J1.A4(A<4>) J1.A5(A<5>) J1.A8(A<8>) J1.A9(A<9>) J1.A12(A<12>) J1.A13(A<13>) J1.A16(A<16>) J1.A17(A<17>) J1.A20(A<20>) J1.A21(A<21>) J1.A24(A<24>) J1.A25(A<25>) J1.A28(A<28>) J1.A29(A<29>) J1.A32(A<32>) J1.A33(A<33>) J1.A36(A<36>) J1.A37(A<37>) J1.A40(A<40>) J1.B2(B<2>) J1.B3(B<3>) J1.B6(B<6>) J1.B7(B<7>) J1.B10(B<10>) J1.B11(B<11>) J1.B14(B<14>) J1.B15(B<15>) J1.B18(B<18>) J1.B19(B<19>) J1.B22(B<22>) J1.B23(B<23>) J1.B26(B<26>) J1.B27(B<27>) J1.B30(B<30>) J1.B31(B<31>) J1.B34(B<34>) J1.B35(B<35>) J1.B38(B<38>) J1.B39(B<39>) J1.C1(C<1>) J1.C4(C<4>) J1.C5(C<5>) J1.C8(C<8>) J1.C9(C<9>) J1.C12(C<12>) J1.C13(C<13>) J1.C16(C<16>) J1.C17(C<17>) J1.C20(C<20>) J1.C21(C<21>) J1.C24(C<24>) J1.C25(C<25>) J1.C28(C<28>) J1.C29(C<29>) J1.C32(C<32>) J1.C33(C<33>) J1.C36(C<36>) J1.C38(C<38>) J1.C40(C<40>) J1.D2(D<2>) J1.D3(D<3>) J1.D6(D<6>) J1.D7(D<7>) J1.D10(D<10>) J1.D13(D<13>) J1.D16(D<16>) J1.D19(D<19>) J1.D22(D<22>) J1.D25(D<25>) J1.D28(D<28>) J1.D37(D<37>) J1.D39(D<39>) J1.E1(E<1>) J1.E4(E<4>) J1.E5(E<5>) J1.E8(E<8>) J1.E11(E<11>) J1.E14(E<14>) J1.E17(E<17>) J1.E20(E<20>) J1.E23(E<23>) J1.E26(E<26>) J1.E29(E<29>) J1.E32(E<32>) J1.E35(E<35>) J1.E38(E<38>) J1.E40(E<40>) J1.F2(F<2>) J1.F3(F<3>) J1.F6(F<6>) J1.F9(F<9>) J1.F12(F<12>) J1.F15(F<15>) J1.F18(F<18>) J1.F21(F<21>) J1.F24(F<24>) J1.F27(F<27>) J1.F30(F<30>) J1.F33(F<33>) J1.F36(F<36>) J1.F39(F<39>) J1.G1(G<1>) J1.G4(G<4>) J1.G5(G<5>) J1.G8(G<8>) J1.G11(G<11>) J1.G14(G<14>) J1.G17(G<17>) J1.G20(G<20>) J1.G23(G<23>) J1.G26(G<26>) J1.G29(G<29>) J1.G32(G<32>) J1.G35(G<35>) J1.G38(G<38>) J1.G40(G<40>) J1.H2(H<2>) J1.H3(H<3>) J1.H6(H<6>) J1.H9(H<9>) J1.H12(H<12>) J1.H15(H<15>) J1.H18(H<18>) J1.H21(H<21>) J1.H24(H<24>) J1.H27(H<27>) J1.H30(H<30>) J1.H33(H<33>) J1.H36(H<36>) J1.H39(H<39>) J1.J1(J<1>) J1.J4(J<4>) J1.J5(J<5>) J1.J8(J<8>) J1.J11(J<11>) J1.J14(J<14>) J1.J17(J<17>) J1.J20(J<20>) J1.J23(J<23>) J1.J26(J<26>) J1.J29(J<29>) J1.J32(J<32>) J1.J35(J<35>) J1.J38(J<38>) J1.J40(J<40>) J1.K2(K<2>) J1.K3(K<3>) J1.K6(K<6>) J1.K9(K<9>) J1.K12(K<12>) J1.K15(K<15>) J1.K18(K<18>) J1.K21(K<21>) J1.K24(K<24>) J1.K27(K<27>) J1.K30(K<30>) J1.K33(K<33>) J1.K36(K<36>) J1.K39(K<39>) J4.1(VEET1) J4.10(VEER1) J4.11(VEER2) J4.14(VEER3) J4.17(VEET2) J4.20(VEET3) J8.1(A<0>) LD1.2(K1) LD1.4(K0) LD2.2(K1) LD2.4(K0) LM1.2(B<0>) LM1.3(B<1>) LM1.4(B<2>) LM1.5(B<3>) LM2.2(B<0>) LM2.3(B<1>) LM2.4(B<2>) LM2.5(B<3>) OPT1.4(GND) PX1.2 PX1.3 QZ1.2(GND) R1.1(A<0>) R2.1(A<0>) R12.2(B<0>) R13.1(A<0>) R14.1(A<0>) R15.2(B<0>) R21.2(B<0>) R34.1(A<0>) REG1.2(GND) SFP1.1 SFP1.2 SFP1.3 SFP1.4 SFP1.5 SFP1.6 SFP1.7 SFP1.8 SFP1.9 SFP1.10 SFP1.11 SFP1.12 SFP1.13 SFP1.14 SFP1.15 SFP1.16 SFP1.17 SFP1.18 SFP1.19 SFP1.20
P2V5: C45.2(B<0>) J7.3(A<2>) REG1.5(OUT)
P3V3: C1.1(A<0>) C2.1(A<0>) C3.1(A<0>) C4.1(A<0>) C5.1(A<0>) C6.1(A<0>) C7.1(A<0>) C9.1(A<0>) C11.2(B<0>) C13.1(A<0>) C15.2(B<0>) C17.2(B<0>) C21.2(B<0>) C22.2(B<0>) C24.1(A<0>) C25.2(B<0>) C26.2(B<0>) C29.2(B<0>) C30.2(B<0>) C33.2(B<0>) C34.2(B<0>) C35.2(B<0>) C36.2(B<0>) C37.2(B<0>) C40.2(B<0>) C41.2(B<0>) C46.2(B<0>) IC1.1(VCCA) IC2.1(VCCA) IC3.1 IC4.10 IC4.20 IC4.22(DE<0>) IC4.29 IC4.34(DE<0>) IC4.38 IC5.5 IC6.5 IC7.1 IC8.1 IC9.1 IC10.7 IC10.14 IC11.7 IC11.14 IC12.1 IC12.2 IC12.10(REFCLKP) IC12.12 IC12.18 IC12.24 IC12.31 IC12.32 IC15.8(VCCB) IC16.1(VCCA) IC16.5(DIR) IC17.14 J1.C39(C<39>) J1.D36(D<36>) J1.D38(D<38>) J1.D40(D<40>) J7.2(A<1>) J8.2(A<1>) L1.2(B<0>) L2.1(A<0>) QZ1.4(VDD) R22.1(A<0>) R23.1(A<0>) R24.2(B<0>) R25.2(B<0>) R26.2(B<0>) R27.2(B<0>) R28.1(A<0>) R29.1(A<0>) R30.2(B<0>) R31.2(B<0>) R32.2(B<0>) R33.2(B<0>) R40.1(A<0>) R41.1(A<0>) R46.2(B<0>) REG1.1(IN) REG1.3(EN)
P5V: C12.2(B<0>) IC13.2(OUT) OPT1.1(VCC)
P12V: J1.C35(C<35>) J1.C37(C<37>) J8.3(A<2>) R37.1(A<0>)
VCC: IC18.6 IC18.22 IC18.25 IC18.28 IC18.31 IC18.34
VDD: IC19.21 IC19.32 IC19.39 IC19.40
VDDA: IC19.8 IC19.9
VDDS: IC19.26
2DE: IC2.3(A2) IC4.31(DE<0>)
3DE: IC2.2(A1) IC4.25(DE<0>)
CDR_CLK_DIVIDED_QB0_N: IC4.8(B<0>) IC10.2(QB0*)
CDR_CLK_DIVIDED_QB0_P: IC4.7(A<0>) IC10.1(QB0)
CDR_CLK_FANOUT_Q0_N: IC10.9(IN*) IC11.16(Q*<0>)
CDR_CLK_FANOUT_Q0_P: IC10.12(IN) IC11.15(Q<0>)
CDR_CLK_FANOUT_Q2_N: IC4.17(B<0>) IC11.4(Q*<0>)
CDR_CLK_FANOUT_Q2_P: IC4.16(A<0>) IC11.3(Q<0>)
CDR_CLKOUT_N: C27.2(B<0>) IC11.9(IN*)
CDR_CLKOUT_P: C28.2(B<0>) IC11.12(IN)
CDR_DATAOUT_N: C31.2(B<0>) J1.D15(D<15>)
CDR_DATAOUT_P: C32.2(B<0>) J1.D14(D<14>)
CDR_IN_N: C44.1(A<0>) R8.2(B<0>) R36.2(B<0>)
CDR_IN_P: C43.1(A<0>) R9.2(B<0>) R35.2(B<0>)
CDR_LOL: IC6.2(A) IC12.16(LOL) IC16.2(A1) IC17.3(A<0>)
CDR_LOS: IC6.1(B) IC12.22(LOS) IC16.3(A2) IC17.5(A<0>)
CDR_OK: IC5.1(A) IC6.4(Y*)
CDR_SCL: IC12.20(SCK) J5.2(A<1>)
CDR_SDA: IC12.21(SDA) J6.2(A<1>)
CLKOUT_N: C27.1(A<0>) IC12.25(CLKOUTN) R30.1(A<0>)
CLKOUT_P: C28.1(A<0>) IC12.26(CLKOUTP) R31.1(A<0>)
CTRLVCC: C18.2(B<0>) IC14.8(VCC) J1.D32(D<32>) R38.2(B<0>) R39.2(B<0>)
CVCC: C8.2(B<0>) C10.2(B<0>) C14.2(B<0>) C16.2(B<0>) C23.2(B<0>) IC1.8(VCCB) IC2.8(VCCB) IC9.23 IC9.24 IC15.1(VCCA) IC16.8(VCCB) J7.1(A<0>) J7.4(A<3>) J7.5(A<4>) R3.2(B<0>) R4.2(B<0>) R6.2(B<0>) R7.2(B<0>) R16.2(B<0>) R17.2(B<0>) R18.2(B<0>) R19.2(B<0>) R20.2(B<0>) R42.2(B<0>) R43.2(B<0>) R44.2(B<0>)
DATAOUT_N: C31.1(A<0>) IC12.28(DATAOUTN) R32.1(A<0>)
DATAOUT_P: C32.1(A<0>) IC12.29(DATAOUTP) R33.1(A<0>)
DIVIDER_DIV4: IC1.2(A1) IC10.16(S0)
DIVIDER_RST_B: IC1.3(A2) IC10.8(RESET*)
FICER_N: OPT1.3(OUT) R8.1(A<0>)
FICER_P: OPT1.2(OUT*) R9.1(A<0>)
FMC_CLK0_M2C_N: IC4.23(Z*<0>) J1.H5(H<5>)
FMC_CLK0_M2C_P: IC4.24(Y<0>) J1.H4(H<4>)
FMC_CLK1_M2C_N: IC4.32(Z*<0>) J1.G3(G<3>)
FMC_CLK1_M2C_P: IC4.33(Y<0>) J1.G2(G<2>)
FMC_CLK2_BIDIR_N: IC4.26(Z*<0>) J1.K5(K<5>)
FMC_CLK2_BIDIR_P: IC4.27(Y<0>) J1.K4(K<4>)
FMC_GA0: IC14.2(A1) J1.C34(C<34>)
FMC_GA1: IC14.1(A0) J1.D35(D<35>)
FMC_LA00_N: IC2.7(B1) J1.G7(G<7>) R14.2(B<0>)
FMC_LA00_P: IC9.14(B<0>) J1.G6(G<6>) R15.1(A<0>)
FMC_LA01_N: IC5.3(B) J1.D9(D<9>) R3.1(A<0>)
FMC_LA01_P: IC2.6(B2) J1.D8(D<8>) R13.2(B<0>)
FMC_LA02_N: IC9.16(B<0>) J1.H8(H<8>) R17.1(A<0>)
FMC_LA02_P: IC9.15(B<0>) J1.H7(H<7>) R16.1(A<0>)
FMC_LA03_N: IC9.20(B<0>) J1.G10(G<10>) R21.1(A<0>)
FMC_LA03_P: IC9.17(B<0>) J1.G9(G<9>) R18.1(A<0>)
FMC_LA04_N: IC9.19(B<0>) J1.H11(H<11>) R20.1(A<0>)
FMC_LA04_P: IC9.18(B<0>) J1.H10(H<10>) R19.1(A<0>)
FMC_LA05_N: IC17.1(A<0>) J1.D12(D<12>) R44.1(A<0>)
FMC_LA05_P: IC5.4(C) J1.D11(D<11>) R4.1(A<0>)
FMC_LA06_N: IC8.3(Z*) J1.C11(C<11>)
FMC_LA06_P: IC8.4(Y) J1.C10(C<10>)
FMC_LA07_N: IC15.3(SDAA) J1.H14(H<14>) R42.1(A<0>)
FMC_LA07_P: IC15.2(SCLA) J1.H13(H<13>) R43.1(A<0>)
FMC_LA08_N: IC16.6(B2) J1.G13(G<13>)
FMC_LA08_P: IC16.7(B1) J1.G12(G<12>)
FMC_LA10_N: IC1.7(B1) J1.C15(C<15>) R6.1(A<0>)
FMC_LA10_P: IC1.6(B2) J1.C14(C<14>) R7.1(A<0>)
FMC_SCL: IC14.6(SCL) J1.C30(C<30>) J5.3(A<2>) R38.1(A<0>)
FMC_SDA: IC14.5(SDA) J1.C31(C<31>) J6.3(A<2>) R39.1(A<0>)
FPGA_SCL: IC15.7(SCLB) J5.1(A<0>) R41.2(B<0>)
FPGA_SDA: IC15.6(SDAB) J6.1(A<0>) R40.2(B<0>)
FRONT_PANEL_CLK_N: IC4.13(B<0>) IC7.3(Z*)
FRONT_PANEL_CLK_P: IC4.12(A<0>) IC7.4(Y)
IN_N: C44.2(B<0>) IC12.4(NIN)
IN_P: C43.2(B<0>) IC12.5(PIN)
LEMO1: IC8.5(D) J3.2(A<1>) LM2.1(A)
LEMO2: IC7.5(D) J2.2(A<1>) LM1.1(A)
S10: IC4.1(S0<0>) IC9.10(A<0>)
S11: IC4.2(S1<0>) IC9.9(A<0>)
S20: IC4.5(S0<0>) IC9.8(A<0>)
S21: IC4.6(S1<0>) IC9.7(A<0>)
S30: IC4.14(S0<0>) IC9.6(A<0>)
S31: IC4.15(S1<0>) IC9.5(A<0>)
S40: IC4.18(S0<0>) IC9.4(A<0>)
S41: C20.1(A<0>) IC4.19(S1<0>) IC5.6(Y)
TTCSFP_N: J4.12(RD-) R36.1(A<0>)
TTCSFP_P: J4.13(RD+) R35.1(A<0>)
UNNAMED_2_CAPCERSMDCL2_I68_B: C47.2(B<0>) REG1.4(NR)
UNNAMED_2_CON2P_I172_A: J2.1(A<0>) R1.2(B<0>)
UNNAMED_2_CON2P_I173_A: J3.1(A<0>) R2.2(B<0>)
UNNAMED_2_CON400P40ABCDEFGHJK_I: J1.D30(D<30>) J1.D31(D<31>)
UNNAMED_2_PCA9517_I162_EN: IC15.5(EN) TP2.1(A<0>)
UNNAMED_3_QZFXOHC73_I189_OUT: C19.2(B<0>) IC3.5(D) QZ1.3(OUT)
UNNAMED_3_RSMD0603_I69_A: IC4.36(Y<0>) R5.1(A<0>)
UNNAMED_3_RSMD0603_I69_B: IC4.35(Z*<0>) R5.2(B<0>)
UNNAMED_3_RSMD0603_I70_A: IC10.3(QB1) R11.1(A<0>)
UNNAMED_3_RSMD0603_I70_B: IC10.4(QB1*) R11.2(B<0>)
UNNAMED_3_RSMD0603_I71_A: IC11.1(Q<0>) R10.1(A<0>)
UNNAMED_3_RSMD0603_I71_B: IC11.2(Q*<0>) R10.2(B<0>)
UNNAMED_3_SY89833L_I254_EN: IC11.8(EN) TP1.1(A<0>)
UNNAMED_11_74LCX04_I8_Y: IC17.2(Y*<0>) R45.2(B<0>)
UNNAMED_11_74LCX04_I9_Y: IC17.6(Y*<0>) R47.2(B<0>)
UNNAMED_11_74LCX04_I179_Y: IC17.4(Y*<0>) R48.2(B<0>)
UNNAMED_11_ADN2814_I23_CF1: C39.1(A<0>) IC12.15(CF1)
UNNAMED_11_ADN2814_I23_CF2: C39.2(B<0>) IC12.14(CF2)
UNNAMED_11_ADN2814_I23_SQUELCH: IC12.27(SQUELCH) R12.1(A<0>)
UNNAMED_11_ADN2814_I23_THRADJ: C42.2(B<0>) IC12.9(THRADJ) R34.2(B<0>)
UNNAMED_11_ADN2814_I23_VREF: C38.2(B<0>) IC12.3(VREF)
UNNAMED_11_ADP3367_I160_VIN: IC13.8(VIN) R37.2(B<0>)
UNNAMED_11_CON20PSFP_I175_LOS: J4.8(LOS) R23.2(B<0>)
UNNAMED_11_CON20PSFP_I175_MOD_1: J4.5(MOD_DEF1/SCL) R26.1(A<0>)
UNNAMED_11_CON20PSFP_I175_MOD_2: J4.4(MOD_DEF2/SDA) R27.1(A<0>)
UNNAMED_11_CON20PSFP_I175_MODDE: J4.6(MOD_DEF0/MOD_ABS) R25.1(A<0>)
UNNAMED_11_CON20PSFP_I175_RATES: J4.7(RATE_SELECT/RS0) R24.1(A<0>)
UNNAMED_11_CON20PSFP_I175_TXDIS: J4.3(TX_DISABLE) R28.2(B<0>)
UNNAMED_11_CON20PSFP_I175_TXFAU: J4.2(TX_FAULT) R29.2(B<0>)
UNNAMED_11_CON20PSFP_I175_VCCR: J4.15(VCCR) L1.1(A<0>)
UNNAMED_11_CON20PSFP_I175_VCCT: J4.16(VCCT) L2.2(B<0>)
UNNAMED_11_CON20PSFP_I175_VEER: J4.9(VEER/RS1) R22.2(B<0>)
UNNAMED_11_LED2_I177_A0: LD1.3(A0) R48.1(A<0>)
UNNAMED_11_LED2_I177_A1: LD1.1(A1) R47.1(A<0>)
UNNAMED_11_LED2_I184_A0: LD2.3(A0) R46.1(A<0>)
UNNAMED_11_LED2_I184_A1: LD2.1(A1) R45.1(A<0>)
VPP: J1.G39(G<39>) J1.H40(H<40>) J7.6(A<5>)
XTAL_N: IC3.3(Z*) IC4.4(B<0>)
XTAL_P: IC3.4(Y) IC4.3(A<0>)

Pads without a net: IC9 3 21; IC10 5 6 10 11; IC11 5 6 10 11; IC13 1 7; IC14 7; IC17 8 9 10 11 12 13; IC18 1 2 3 4 5 7 8 9 10 11 14 15 16 17 18 19 23 24 26 27 29 30 32 33 37 38 39 40 41 42; IC19 1 2 3 4 5 6 7 10 11 12 13 14 15 16 17 18 19 20 22 23 24 25 27 28 29 30 31 33 34 35 36 37 38 41 42 43 44; J1 A2 A3 A6 A7 A10 A11 A14 A15 A18 A19 A22 A23 A26 A27 A30 A31 A34 A35 A38 A39 B1 B4 B5 B8 B9 B12 B13 B16 B17 B20 B21 B24 B25 B28 B29 B32 B33 B36 B37 B40 C2 C3 C6 C7 C18 C19 C22 C23 C26 C27 D1 D4 D5 D17 D18 D20 D21 D23 D24 D26 D27 D29 D33 D34 E2 E3 E6 E7 E9 E10 E12 E13 E15 E16 E18 E19 E21 E22 E24 E25 E27 E28 E30 E31 E33 E34 E36 E37 E39 F1 F4 F5 F7 F8 F10 F11 F13 F14 F16 F17 F19 F20 F22 F23 F25 F26 F28 F29 F31 F32 F34 F35 F37 F38 F40 G15 G16 G18 G19 G21 G22 G24 G25 G27 G28 G30 G31 G33 G34 G36 G37 H1 H16 H17 H19 H20 H22 H23 H25 H26 H28 H29 H31 H32 H34 H35 H37 H38 J2 J3 J6 J7 J9 J10 J12 J13 J15 J16 J18 J19 J21 J22 J24 J25 J27 J28 J30 J31 J33 J34 J36 J37 J39 K1 K7 K8 K10 K11 K13 K14 K16 K17 K19 K20 K22 K23 K25 K26 K28 K29 K31 K32 K34 K35 K37 K38 K40; J4 18 19; PX1 1; QZ1 1; SFP1 NC

## Via types
v1: diameter 0.6, hole 0.3, TOP to BOTTOM, 169 vias
v2: diameter 0.8, hole 0.4, TOP to BOTTOM, 175 vias

## Routing (per net, layer and track width the routed paths; a pad name or vN(x,y) marks a point on that pad's centre or on a via; arc(x,y) is an arc through that point)
GND: length 282.8
  TOP w0.2: v2(46.3,42.1) 46.2,42.2 IC1.4
  TOP w0.3: R12.2 49.55,21.3 v2(49.05,21.8) ; v2(32.3,54.7) 32.35,54.65 C3.2 ; C4.2 35.4,54.65 v2(35.45,54.7) ; LM1.5 6.14,55.52 6.15,55.53 R1.1 ; C2.2 v2(26.6,50.8) ; v2(16.27,14.37) 17.64,13 C15.1 ; C6.2 v2(39.95,54.7) ; C9.2 v2(50.07,49.1) ; v2(54.3,59.4) C8.1 ; v2(49.6,41.9) 49.3,42.2 IC1.5 ; v2(35.37,52.1) 35.4,52.13 C5.2 ; v2(54.3,62.4) C7.2 ; v2(16.3,18.05) 17.15,18.05 17.4,17.8 C13.2 C14.1 ; C16.1 v2(27.9,11.1) ; C17.1 v2(35.9,8) ; v2(49.6,38.3) 49.5,38.2 C11.1 ; v2(22.8,50.1) C1.2 ; C10.1 52.2,44.2 v2(52.3,44.1) ; LM2.5 6.14,47.44 6.1,47.48 R2.1 ; C18.1 v2(52.5,6.4)
  TOP w0.4: v2(15.19,25.14) 15.92,25.14 16.19,25.4 C12.1
  BOTTOM w0.2: IC4.28 v2(35.45,54.7) ; v2(35.37,52.1) 35.37,52.03 35.45,51.95 IC4.11 35.45,48.85 35.6,48.7 36.3,48.7 36.45,48.85 IC4.9 ; IC12.8 46.05,18.8 v2(46.55,19.3) ; IC4.37 v2(39.95,54.7) ; 47.05,21.3 IC12.19 ; 47.05,21.3 v2(46.55,21.8) 46.05,22.3 IC12.17 ; 47.05,21.3 v2(47.8,20.55) 47.05,19.8 IC12.11 ; v2(45,27.59) 45.06,27.65 45.1,27.65 45.35,27.9 IC11.13 46.75,27.9 IC11.17 ; v2(46.55,19.3) 46.85,19.3 47.05,19.1 IC12.6 ; v2(46.55,19.3) IC12.7 ; IC4.30 v2(36.45,57.3) ; IC10.13 54.7,29.4 v2(55.45,28.65) 55.7,28.9 IC10.15 55.7,31.15 55.75,31.2 C25.1 ; IC12.30 49.25,19.8 49.05,19.6 v2(49.05,19.3) ; v2(49.05,25.25) IC12.23 v2(49.05,21.8) ; v2(52.05,19.33) C34.1 C33.1 ; v2(46.55,20.55) 46.3,20.8 IC12.13 ; IC4.21 31.95,55.05 v2(32.3,54.7)
  BOTTOM w0.3: IC2.4 54.25,62.45 v2(54.3,62.4) ; J1.C25 v1(71.39,29.45) ; v1(63.77,38.34) J1.H18 ; v1(72.66,10.41) J1.B39 ; R21.2 v2(58.3,40) ; J1.K27 v1(62.5,26.91) ; v2(49.05,25.25) C30.1 C29.1 ; J1.A32 v1(72.66,20.57) ; J1.J29 v1(62.5,24.38) ; J1.J1 v1(63.77,59.94) ; J1.G17 v1(65.04,38.34) ; J1.A1 v1(72.66,59.94) ; IC6.3 v2(22.8,50.1) ; J1.F39 v1(66.31,10.41) ; J1.A25 v1(72.66,29.45) ; J1.F21 v1(67.58,33.27) ; J1.B22 v1(71.39,33.27) ; C20.2 v2(29.7,47.1) ; 48.06,44.39 48.05,44.4 46.85,44.4 46.6,44.15 v2(46.6,43.9) 46.76,43.74 48.06,43.74 ; v2(52.3,44.1) 52.3,44 52.69,44.39 54,44.39 ; J1.H6 v1(65.04,53.59) J1.G5 J1.G4 ; J1.B6 v1(72.66,53.59) ; J1.B15 v1(72.66,42.16) ; J1.A37 v1(72.66,14.21) ; R15.2 v2(58.3,47.2) ; J1.H36 v1(65.04,15.48) ; J1.C4 v1(71.39,56.12) ; C38.1 v2(48.3,13.25) ; J1.F24 v1(66.31,30.73) ; J1.K21 v1(62.5,34.53) ; v2(47.52,28.57) IC11.17 ; J1.E35 v1(68.85,16.76) ; J1.C28 v1(71.39,25.64) ; v1(72.66,9.13) J1.A40 ; J1.C8 v1(71.39,51.05) ; J1.F3 67.6,56.11 v1(67.6,56.1) ; C36.1 v2(50.3,13.25) ; J1.J20 v1(63.77,34.53) ; v1(65,44.7) 65,44.74 J1.H12 ; 48.06,37.89 49.19,37.89 v2(49.6,38.3) ; J1.E40 v1(67.58,10.41) ; v2(55.9,39) 55.44,38.54 54,38.54 ; J1.A29 v1(72.66,23.11) ; J1.G20 v1(66.31,35.8) ; J1.A12 v1(72.66,45.97) ; J1.A8 v1(72.66,51.05) ; C21.1 15.6,60.7 IC7.2 ; J1.J17 v1(62.5,38.34) J1.K18 ; J1.H33 v1(65.04,19.3) ; J1.J32 v1(62.5,19.3) ; J1.C36 v1(70.12,15.48) ; v1(68.85,59.92) 68.23,59.3 J1.E1 ; v1(68.8,48.5) 69.43,47.87 J1.D10 ; J1.K9 v1(61.23,49.77) ; IC8.2 15.6,52.7 C22.1 ; J1.D13 v1(70.12,43.42) ; J1.H24 v1(65.04,30.73) ; J1.C9 v1(71.39,48.51) J1.B10 v1(72.66,48.51) J1.A9 ; v1(71.39,23.11) J1.B30 ; J1.H9 v1(65.04,49.77) J1.G8 ; J1.F12 66.97,45.33 v1(67.6,44.7) ; J1.A5 v1(72.66,54.85) ; J1.B34 v1(72.66,18.02) ; v2(54.3,59.4) 54.25,59.35 IC2.5 ; J1.D6 v1(68.85,53.59) ; J1.D37 v1(68.85,12.95) ; J1.H15 v1(63.77,42.16) J1.J14 ; J1.J40 v1(62.5,10.41) ; J1.A33 v1(72.66,19.3) ; J1.C32 v1(70.12,19.3) J1.C33 ; J1.C21 v1(71.39,34.53) ; J1.G23 v1(65.04,32) ; J1.E17 v1(67.58,39.62) ; J1.J11 v1(62.5,45.97) J1.K12 ; J1.G1 v1(66.31,59.94) ; J1.G11 65.1,47.18 v1(65.1,47.2) ; J1.C12 v1(71.39,45.97) ; J1.K39 v1(61.23,10.41) ; IC17.7 16.19,14.45 v2(16.27,14.37) ; J1.F30 v1(67.58,21.84) ; J1.F18 v1(67.58,38.34) ; J1.K24 v1(62.5,30.73) ; J1.B27 v1(71.39,26.91) ; v2(45.6,48.1) 45.8,48.3 45.8,48.31 45.88,48.39 45.88,48.62 45.8,48.69 IC3.2 ; v1(68.8,52.3) 69.42,51.68 J1.D7 ; J1.H39 v1(63.77,10.41) ; J1.E20 v1(68.85,34.53) ; J1.B26 v1(71.39,28.18) ; v2(52.5,6.4) 52.5,6.8 52.73,7.04 52.73,8.3 ; J1.C5 v1(71.39,54.85) ; J1.H3 v1(63.77,57.4) ; J1.K33 v1(62.5,18.02) ; J1.G38 v1(66.31,12.95) ; J1.J8 v1(63.77,49.77) ; J1.F6 v1(67.6,52.3) ; J1.J23 v1(63.77,30.73) ; J1.H30 v1(63.77,21.84) ; J1.D25 v1(68.85,29.45) ; J1.K6 v1(61.1,52.95) ; J1.E38 v1(67.58,12.95) ; J1.D16 68.85,40.89 v1(68.85,40.9) ; IC5.2 v2(26.6,50.8) ; J1.K2 v1(62.5,58.66) ; J1.D28 v1(68.85,25.64) ; C19.1 v2(46.7,56.4) ; R14.1 v2(50.7,58) ; J1.B23 v1(71.39,32) ; J1.J38 v1(63.77,12.95) ; J1.G35 v1(66.31,15.48) ; C24.2 45.47,42.25 45.62,42.1 v2(46.3,42.1) ; J1.J4 63.09,55.49 v1(62.5,54.9) 62.5,54.86 J1.J5 ; J1.C13 v1(71.4,44.7) ; J1.D19 v1(68.85,35.8) ; v1(67.6,46) 68.2,46.6 J1.E11 ; J1.B38 v1(72.66,12.95) ; v1(72.66,44.7) J1.A13 ; C37.1 v2(49.3,13.25) ; J1.G29 v1(66.31,24.38) ; v1(70.12,58.65) 70.76,59.29 J1.C1 ; J1.H27 v1(65.04,26.91) ; C23.1 v2(50.7,36.2) ; QZ1.2 49.16,48.86 49.4,49.1 v2(50.07,49.1) ; J1.A24 v1(72.66,30.73) ; C40.1 v2(41.5,20.55) ; J1.J26 v1(63.77,26.91) ; J1.D22 v1(68.85,33.27) ; J1.C29 v1(71.39,24.38) ; J1.B18 v1(71.39,38.34) ; J1.F15 v1(66.31,42.16) J1.G14 ; J1.E8 v1(67.58,49.77) J1.F9 ; J1.K3 v1(62.5,57.4) ; v2(45,27.59) 44.94,27.65 C26.1 ; J1.C24 v1(71.39,30.73) ; J1.E14 v1(68.85,42.16) ; J1.H21 v1(63.77,33.27) ; J1.D3 v1(68.85,57.4) ; J1.K36 v1(62.5,15.48) ; J1.J35 v1(63.77,15.48) ; C41.1 v2(41.5,19.55) ; v1(71.39,15.48) J1.B35 ; J1.C20 v1(71.39,35.8) ; J1.A16 v1(72.66,40.88) ; J1.F2 v1(66.31,58.66) ; J1.B19 v1(72.66,37.08) ; J1.G40 v1(66.31,9.13) ; J1.B31 v1(72.66,21.84) ; J1.B7 v1(72.66,52.31) ; J1.F36 v1(67.58,15.48) ; J1.G32 v1(66.31,19.3) ; J1.H2 v1(63.77,58.66) ; IC15.4 v2(27.9,11.1) ; J1.D2 68.87,58.65 v1(68.85,58.65) ; v1(68.85,24.38) J1.E29 ; J1.E4 v1(68.85,56.12) ; J1.B14 v1(72.66,43.42) ; J1.C40 v1(70.12,9.13) ; J1.B3 v1(72.67,57.4) ; J1.E32 v1(67.58,19.3) J1.F33 ; J1.B11 v1(72.66,47.23) ; J1.A20 v1(72.66,35.8) ; J1.E23 v1(68.85,32) ; J1.A17 v1(72.66,39.62) ; J1.C17 v1(71.39,39.62) ; J1.A36 v1(72.66,15.48) ; IC16.4 v2(16.3,18.05) ; R13.1 v2(55.3,58) ; J1.E5 v1(68.85,54.85) ; J1.A21 v1(72.66,34.53) ; J1.A4 v1(72.66,56.12) ; J1.G26 v1(66.31,28.18) ; J1.C38 v1(71.39,12.95) ; J1.F27 v1(66.31,26.91) ; J1.C16 v1(71.39,40.88) ; J1.K30 v1(62.5,21.84) ; J1.E26 v1(68.85,28.18) ; J1.A28 v1(72.66,25.64) ; J1.K15 v1(62.5,42.16) ; J1.B2 v1(72.66,58.66) ; J1.D39 v1(70.12,10.41)
  BOTTOM w0.4: IC13.6 v2(23,25.14) ; v2(16.6,60.75) C21.1 ; J4.1 v2(30.4,32.5) ; J4.11 v2(34.5,39.3) ; J4.14 v2(34.5,36.9) ; IC14.4 v2(50.19,4.4) ; J4.17 v2(34.5,34.5) ; IC14.3 v2(51.46,4.4) ; IC13.4 v2(15.19,26.41) ; IC13.5 v2(23,26.41) ; C42.1 v2(41.5,18.55) ; J4.10 v2(30.4,39.7) ; REG1.2 40.67,5.25 40.72,5.3 C46.1 v2(41.35,4.25) ; C47.1 v2(40.1,2.75) ; J4.20 v2(34.5,32.1) ; IC13.3 v2(15.19,25.14) ; v2(16.6,52.75) C22.1
  BOTTOM w0.5: C45.1 v2(40.85,8.25) ; C35.1 v2(52.55,13.25) ; R34.1 v2(41.5,17.3)
  vias: v2(47.8,21.8) v2(47.8,19.3) v2(49.05,20.55)
P2V5: length 12.8
  BOTTOM w0.4: C45.2 37.05,7.85 REG1.5
  BOTTOM w0.6: J7.3 30.83,2 33.35,2 34.7,3.35 34.7,4.85 36.05,6.2 REG1.5
P3V3: length 109.3
  TOP w0.3: v2(44.7,44.25) 44.7,43.95 44.95,43.7 IC1.1 ; v2(20.3,17.5) 19.75,18.05 18.57,18.05 18.3,17.77 C13.1 ; v2(49.56,37.24) 49.5,37.3 C11.2 ; v2(36.4,52.1) 36.3,52.2 C5.1 ; C15.2 v2(18.85,10.55) ; v2(24.7,49.08) 24.65,49.12 C1.1 ; C3.1 31.45,54.45 v2(31.2,54.7) ; C7.1 51.5,62.4 v2(51.45,62.45) ; C6.1 40.85,54.65 v2(40.9,54.7) ; C4.1 36.3,54.5 v2(36.5,54.7) ; C17.2 v2(33.4,8) ; v2(53.53,49.1) C9.1 ; C2.1 v2(30.6,50.8)
  BOTTOM w0.2: IC4.22 32.45,57.25 v2(32.3,57.4) ; IC4.29 35.95,55.15 36.4,54.7 v2(36.5,54.7) ; IC4.10 35.95,51.65 v2(36.4,52.1) ; C37.2 49.3,16.05 ; IC4.34 38.45,54.85 v2(38.3,54.7) ; C36.2 50.3,16.05 ; v2(13.6,52.75) C22.2 IC8.1 ; IC10.14 55.2,30.8 v2(54.9,31.1) ; IC12.24 49.55,23.85 C30.2 C29.2 51,24.3 v2(51,23.52) ; IC11.7 v2(49.9,28.4) ; IC12.2 49.05,17.05 ; R41.1 v2(34.3,6.9) ; v2(31.2,54.7) 31.45,54.95 IC4.20 ; IC12.1 49.55,17.05 ; IC10.7 55.2,26.47 v2(54.86,26.13) ; IC7.1 C21.2 v2(13.6,60.75) ; IC12.18 v2(46.55,23.93) ; IC12.32 51.05,18.8 ; REG1.3 38.55,4.3 38.27,4.58 38.27,5.92 38.55,6.2 REG1.1 C46.2 v2(41.35,7.25) ; v2(44.98,28.52) 45.1,28.4 IC11.14 ; R40.1 v2(34.3,11.8) ; C40.2 44.05,20.55 ; J1.D38 70.12,12.95 v1(70.12,14.21) ; C41.2 44.05,19.55 ; IC12.10 44.55,19.3 ; IC12.31 50.8,19.3 ; IC12.12 44.55,20.3
  BOTTOM w0.25: v2(40.9,54.7) 40.44,55.16 40.44,55.99 IC4.38
  BOTTOM w0.3: R33.2 v2(58.1,18.4) ; v2(44.7,36.4) 43.7,36.4 43.4,36.7 L1.2 43.4,38.1 43.6,38.3 44.65,38.3 v2(44.7,38.25) ; v2(44.8,33.1) 44.7,33 43.6,33 43.4,33.2 L2.1 43.4,34.5 43.7,34.8 v2(44.8,34.8) ; IC2.1 v2(51.45,62.45) ; QZ1.4 54.24,49.81 v2(53.53,49.1) ; 32.3,8.43 32.97,8.43 v2(33.4,8) ; C24.1 v2(44.7,44.25) ; v2(44.98,28.52) 44.95,28.55 C26.2 ; IC6.5 25.2,48.8 24.92,49.08 v2(24.7,49.08) ; IC5.5 v2(30.6,50.8) ; IC3.1 v2(46.75,48.15) ; R31.2 v2(52.4,26.1) ; IC16.1 v2(15.35,15.8) ; IC17.14 v2(18.85,10.55) ; C25.2 54.85,31.15 v2(54.9,31.1) ; IC16.5 20.1,17.3 v2(20.3,17.5) ; J1.D40 v1(68.85,10.41) ; R30.2 56.15,25.75 55.8,26.1 v2(55.8,26.13) ; J1.D36 v1(70.12,14.21) ; 48.06,37.24 v2(49.56,37.24) ; J1.C39 v1(71.39,10.41) ; R32.2 v2(58.1,21.9)
  BOTTOM w0.4: 49.82,15 C36.2 50.78,15 ; v2(24.65,40.33) R22.1 R23.1 R24.2 R25.2 R26.2 R27.2 R28.1 R29.1 v2(24.65,31.5) ; C35.2 52.55,16.98 ; C35.2 52.55,15.42 ; C35.2 53.43,16.2 ; C35.2 51.67,16.2 ; 52.57,17.6 C33.2 ; C33.2 53.53,17.6 ; C33.2 53.05,17.12 ; C34.2 52.53,17.6 ; C34.2 51.57,17.6 ; C34.2 52.05,17.12
  BOTTOM w0.5: J8.2 18.56,5.68 17.44,6.8 R46.2
  vias: v2(44.3,20.3) v2(44.3,19.55) v2(49.3,16.3) v2(50.3,17.3) v2(51.05,18.05) v2(51.05,16.3)
P5V: length 11.5
  TOP w0.4: C12.2 16.19,23.6 15.92,23.86 v2(15.19,23.86) 14.26,24.8 10,24.8 9.1,23.9 OPT1.1
  BOTTOM w0.4: IC13.2 v2(15.19,23.86)
P12V: length 116
  TOP w0.5: v1(71.39,14.21) 70.4,13.22 70.4,12.1 70.7,11.8 74,11.8 ; v1(70.1,16.8) 73.5,16.8 74,16.3 74,11.8 ; 17.72,6.2 17.72,10.78 14.3,14.2 14.3,18.3 15.7,19.7 v2(25.1,19.7) v2(26.1,19.7) v2(27.2,19.7) ; 17.72,6.2 23.2,6.2 23.9,5.5 23.9,2.2 24.8,1.3 59.2,1.3 63.5,5.6 72.8,5.6 74,6.8 74,11.8 ; 17.72,6.2 J8.3
  BOTTOM w0.15: J1.C37 v1(71.39,14.21)
  BOTTOM w0.3: R37.1 26.9,21.1 27.2,20.8 v2(27.2,19.7) ; v1(70.1,16.8) 70.1,16.78 J1.C35
2DE: length 21.4
  BOTTOM w0.15: IC4.31 36.95,56.95 37.2,57.2 37.2,60.2 38.7,61.7 52.85,61.7 53.15,62 IC2.3
3DE: length 24.1
  BOTTOM w0.15: IC4.25 33.95,56.95 33.7,57.2 33.7,58.1 39,63.4 52.33,63.4 52.65,63.08 IC2.2
CDR_CLK_DIVIDED_QB0_N: length 41.8
  TOP w0.12: v2(36.1,47.1) 36.53,46.67 36.53,46.17 40.4,42.3 40.4,36.6 43.2,33.8 48.86,33.8 51,31.66 51,27.76 51.46,27.3 52.6,27.3 54.66,29.36 56.4,29.36 56.58,29.18 57.41,29.18 57.53,29.06 57.53,28.92 57.65,28.8 v2(57.9,28.8)
  BOTTOM w0.12: v2(57.9,28.8) 57.8,28.9 IC10.2 ; IC4.8 36.95,49.4 37.1,49.25 37.1,48.7 36.56,48.16 36.56,47.35 36.31,47.1 v2(36.1,47.1)
CDR_CLK_DIVIDED_QB0_P: length 41.3
  TOP w0.12: v2(37.1,47.1) 36.77,46.77 36.77,46.27 40.64,42.4 40.64,36.7 43.3,34.04 48.96,34.04 51.24,31.76 51.24,27.86 51.56,27.54 52.5,27.54 54.56,29.6 56.5,29.6 56.68,29.42 57.41,29.42 57.53,29.54 57.53,29.68 57.65,29.8 v2(57.9,29.8)
  BOTTOM w0.12: v2(57.9,29.8) 57.7,29.6 57.7,29.59 57.51,29.4 IC10.1 ; IC4.7 37.45,49.41 37.34,49.3 37.34,48.6 36.8,48.06 36.8,47.4 v2(37.1,47.1)
CDR_CLK_FANOUT_Q0_N: length 5.8
  BOTTOM w0.12: 48.95,28.9 49.4,28.9 49.5,29 52.3,29 52.7,28.6 53.2,28.6 53.3,28.5 53.3,28 53.4,27.9 IC10.9
CDR_CLK_FANOUT_Q0_P: length 5.7
  BOTTOM w0.12: 48.95,29.4 49.34,29.4 49.5,29.24 52.4,29.24 52.8,28.84 53.14,28.84 53.3,29 53.3,29.3 53.4,29.4 IC10.12
CDR_CLK_FANOUT_Q2_N: length 37.4
  TOP w0.12: v2(32.2,46.9) 32.3,46.9 32.55,46.65 32.55,45.55 31.16,44.16 31.16,33.94 36,29.1 45.34,29.1 45.7,29.46 45.7,30.6 v2(45.8,30.7)
  BOTTOM w0.12: v2(45.8,30.7) 46.39,30.7 46.59,30.9 47.06,30.9 47.25,30.71 47.25,30.1 ; IC4.17 32.45,49.39 32.54,49.3 32.54,47.24 v2(32.2,46.9)
CDR_CLK_FANOUT_Q2_P: length 36.2
  TOP w0.12: v2(44.9,30.2) 45.26,30.2 45.46,30 45.46,29.56 45.24,29.34 36.1,29.34 31.4,34.04 31.4,44.06 32.79,45.45 32.79,46.49 v2(33.2,46.9)
  BOTTOM w0.12: v2(44.9,30.2) 45.49,30.2 45.59,30.1 46.75,30.1 ; IC4.16 32.95,49.35 32.78,49.18 32.78,47.32 v2(33.2,46.9)
CDR_CLKOUT_N: length 10.5
  BOTTOM w0.12: C27.2 54.75,25 54.63,25.12 54.49,25.12 54.37,25.24 54.37,25.87 53.34,26.9 51.86,26.9 51.15,26.19 47.65,26.19 47.54,26.3 47.54,26.48 47.66,26.6 47.93,26.6 48.25,26.92 IC11.9
